# EAGLE board Thing_Plus_MGM240P-Panel (EAGLE 9.6.2), part 1 of 9
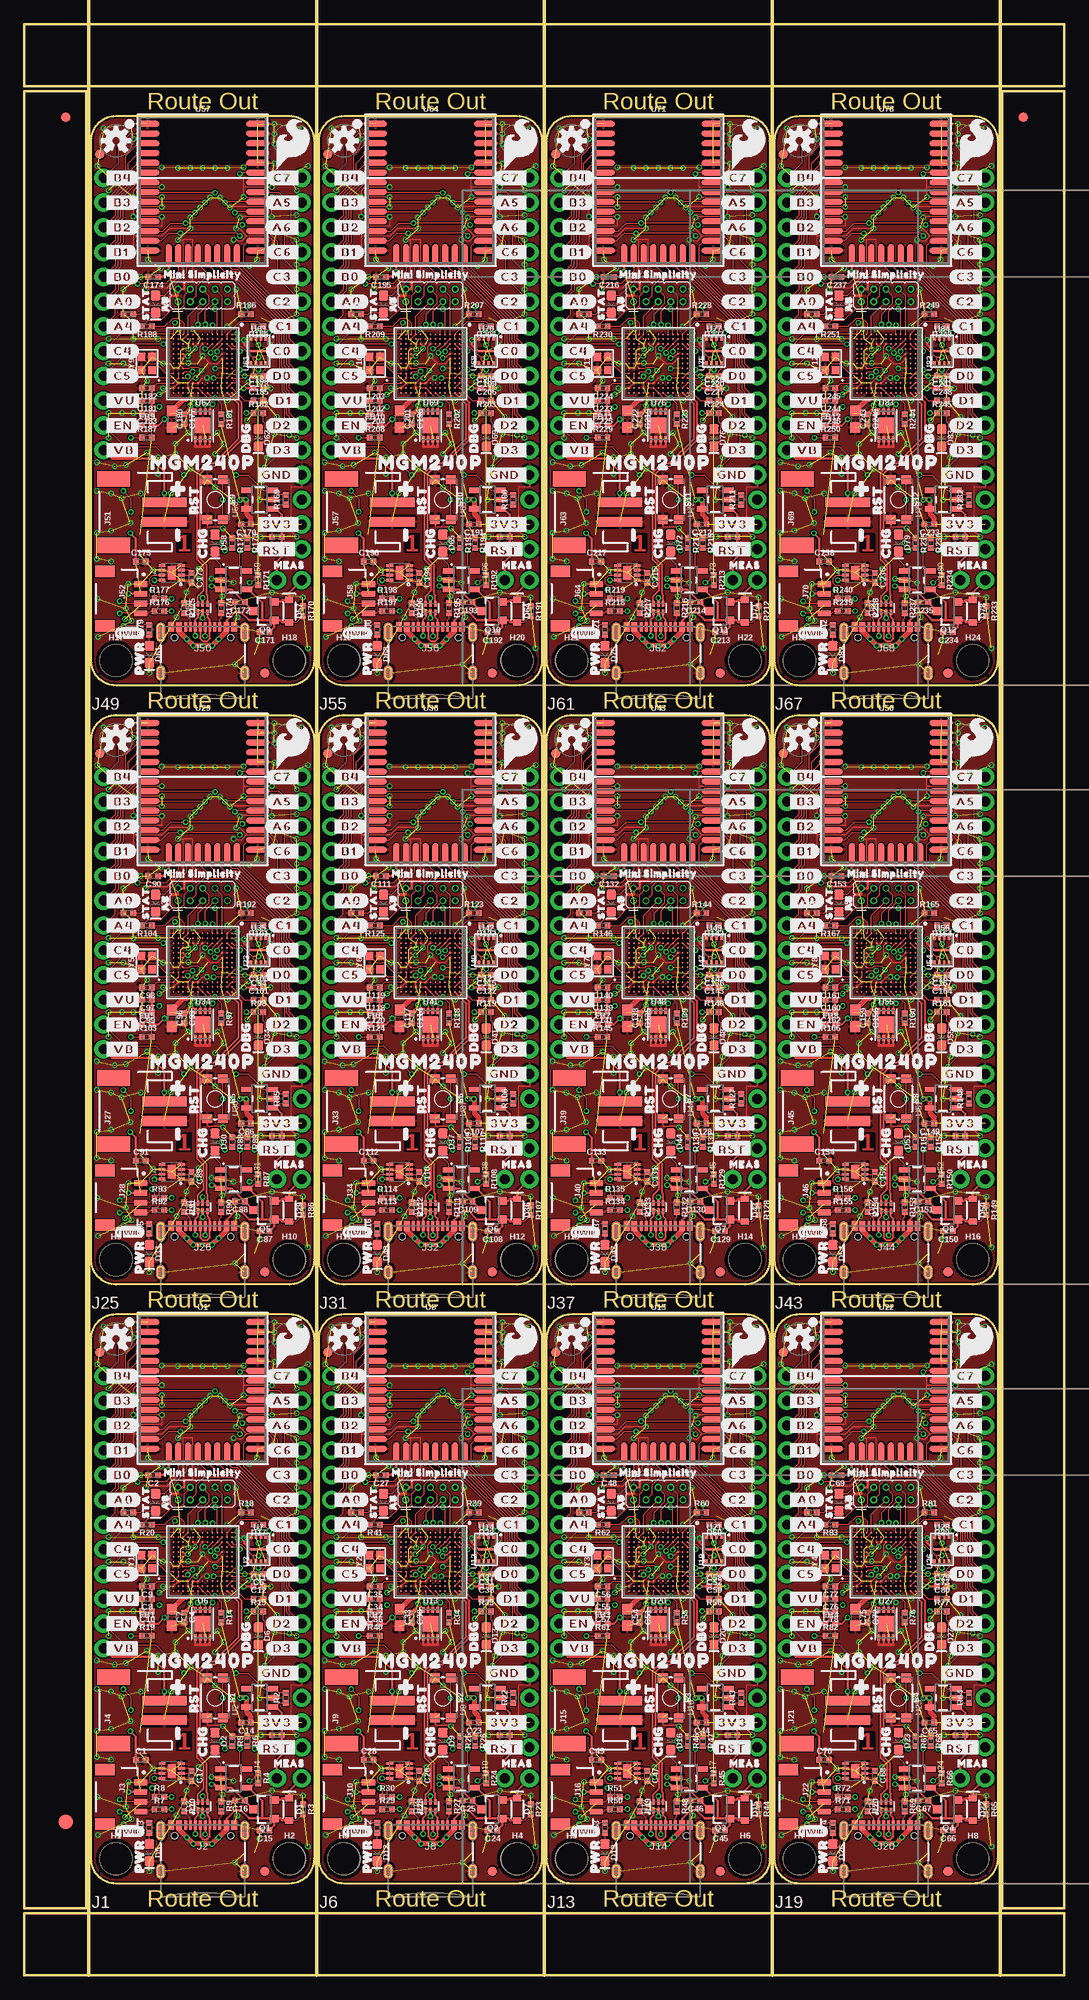
[diagram p0: board, top side]
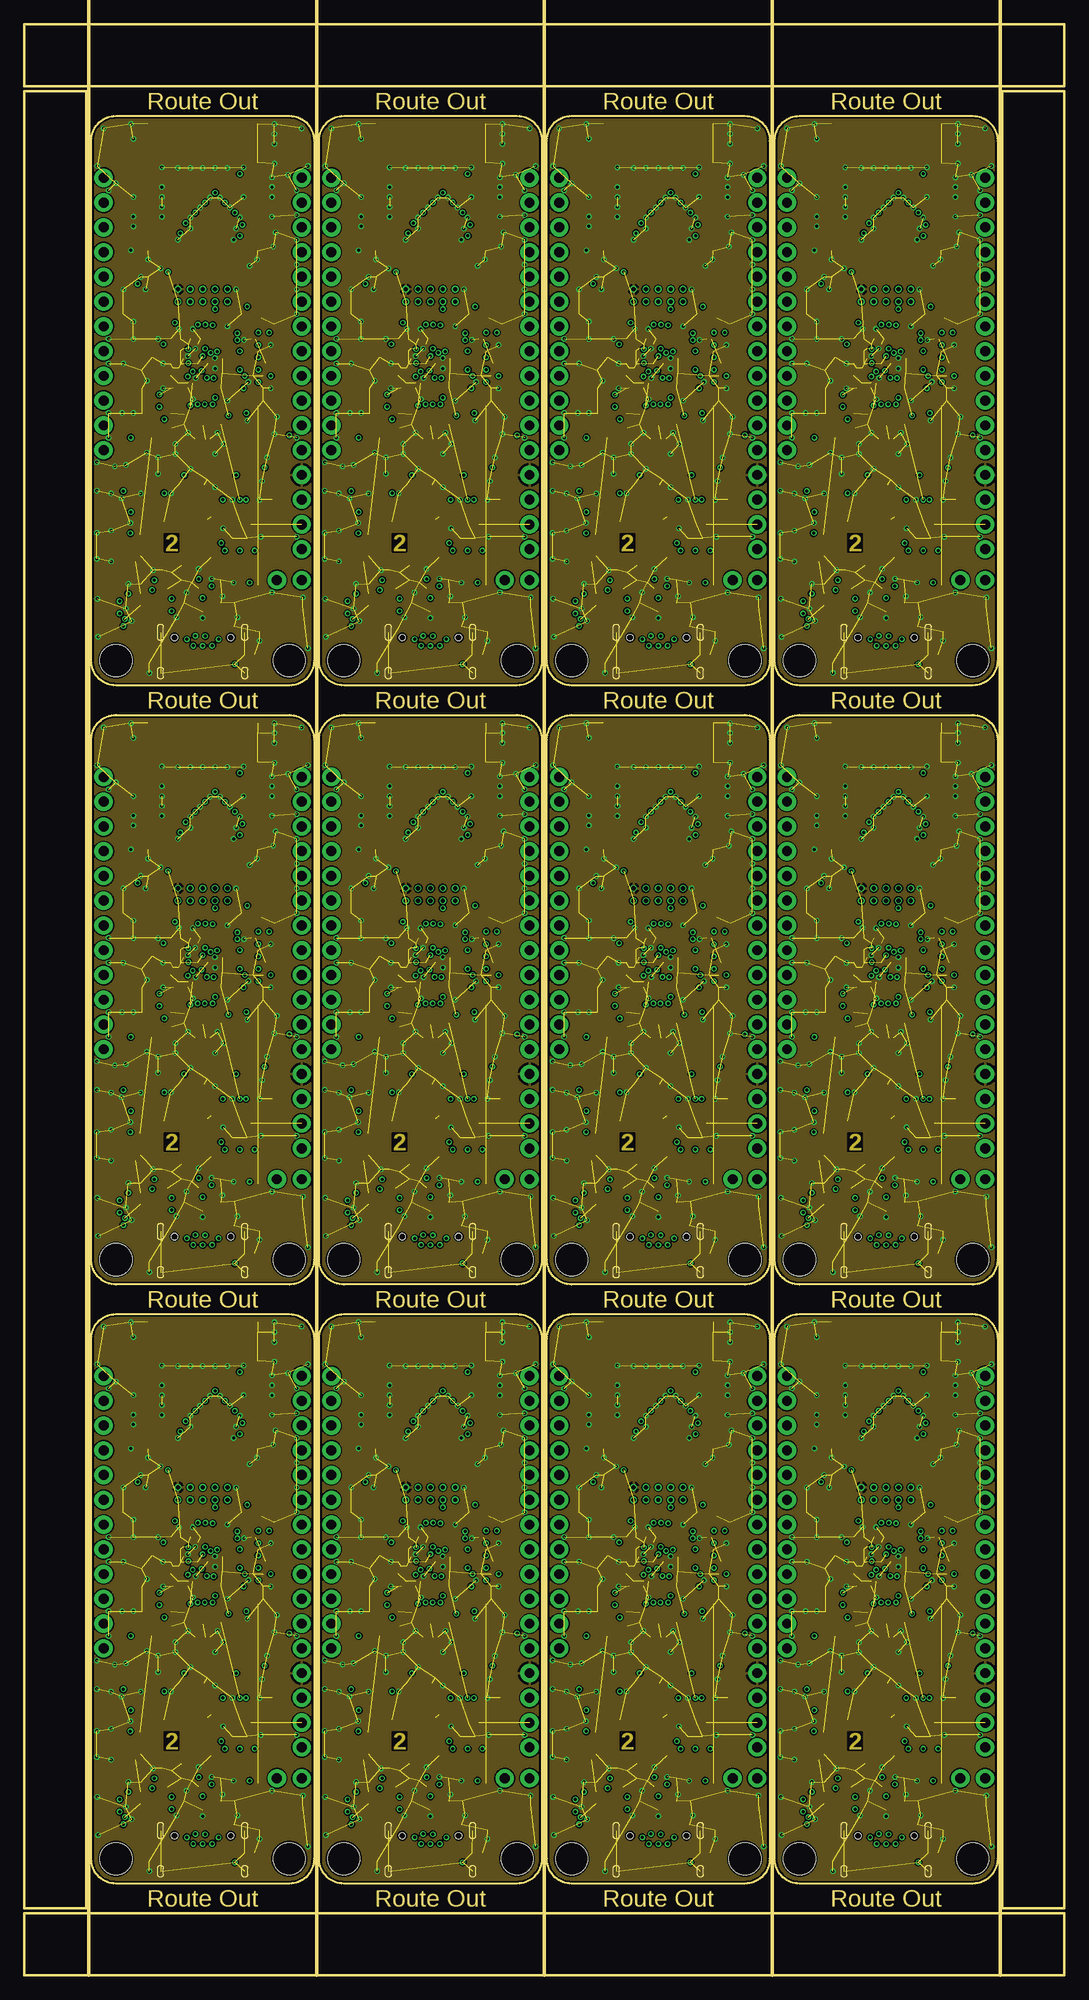
[diagram p1: board, inner layer Route2]
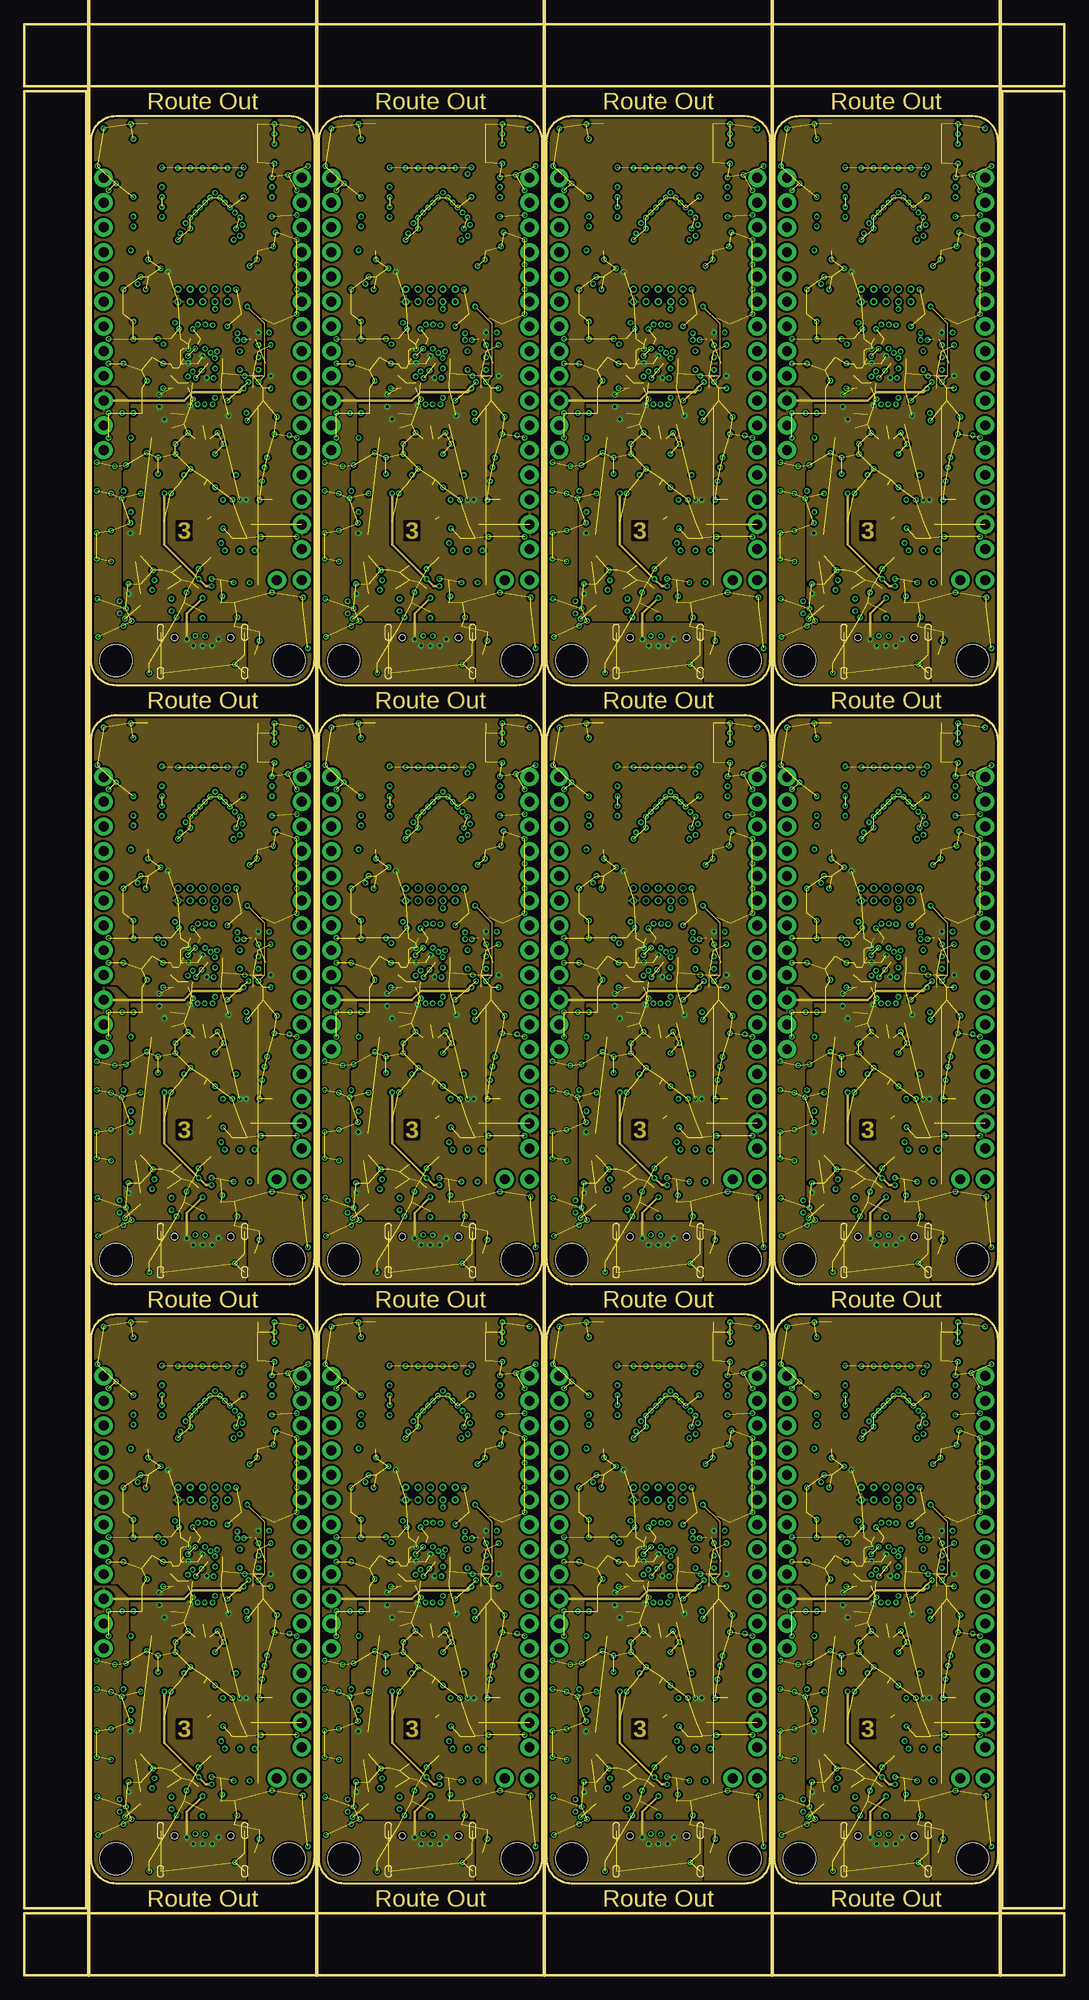
[diagram p2: board, inner layer Route15]
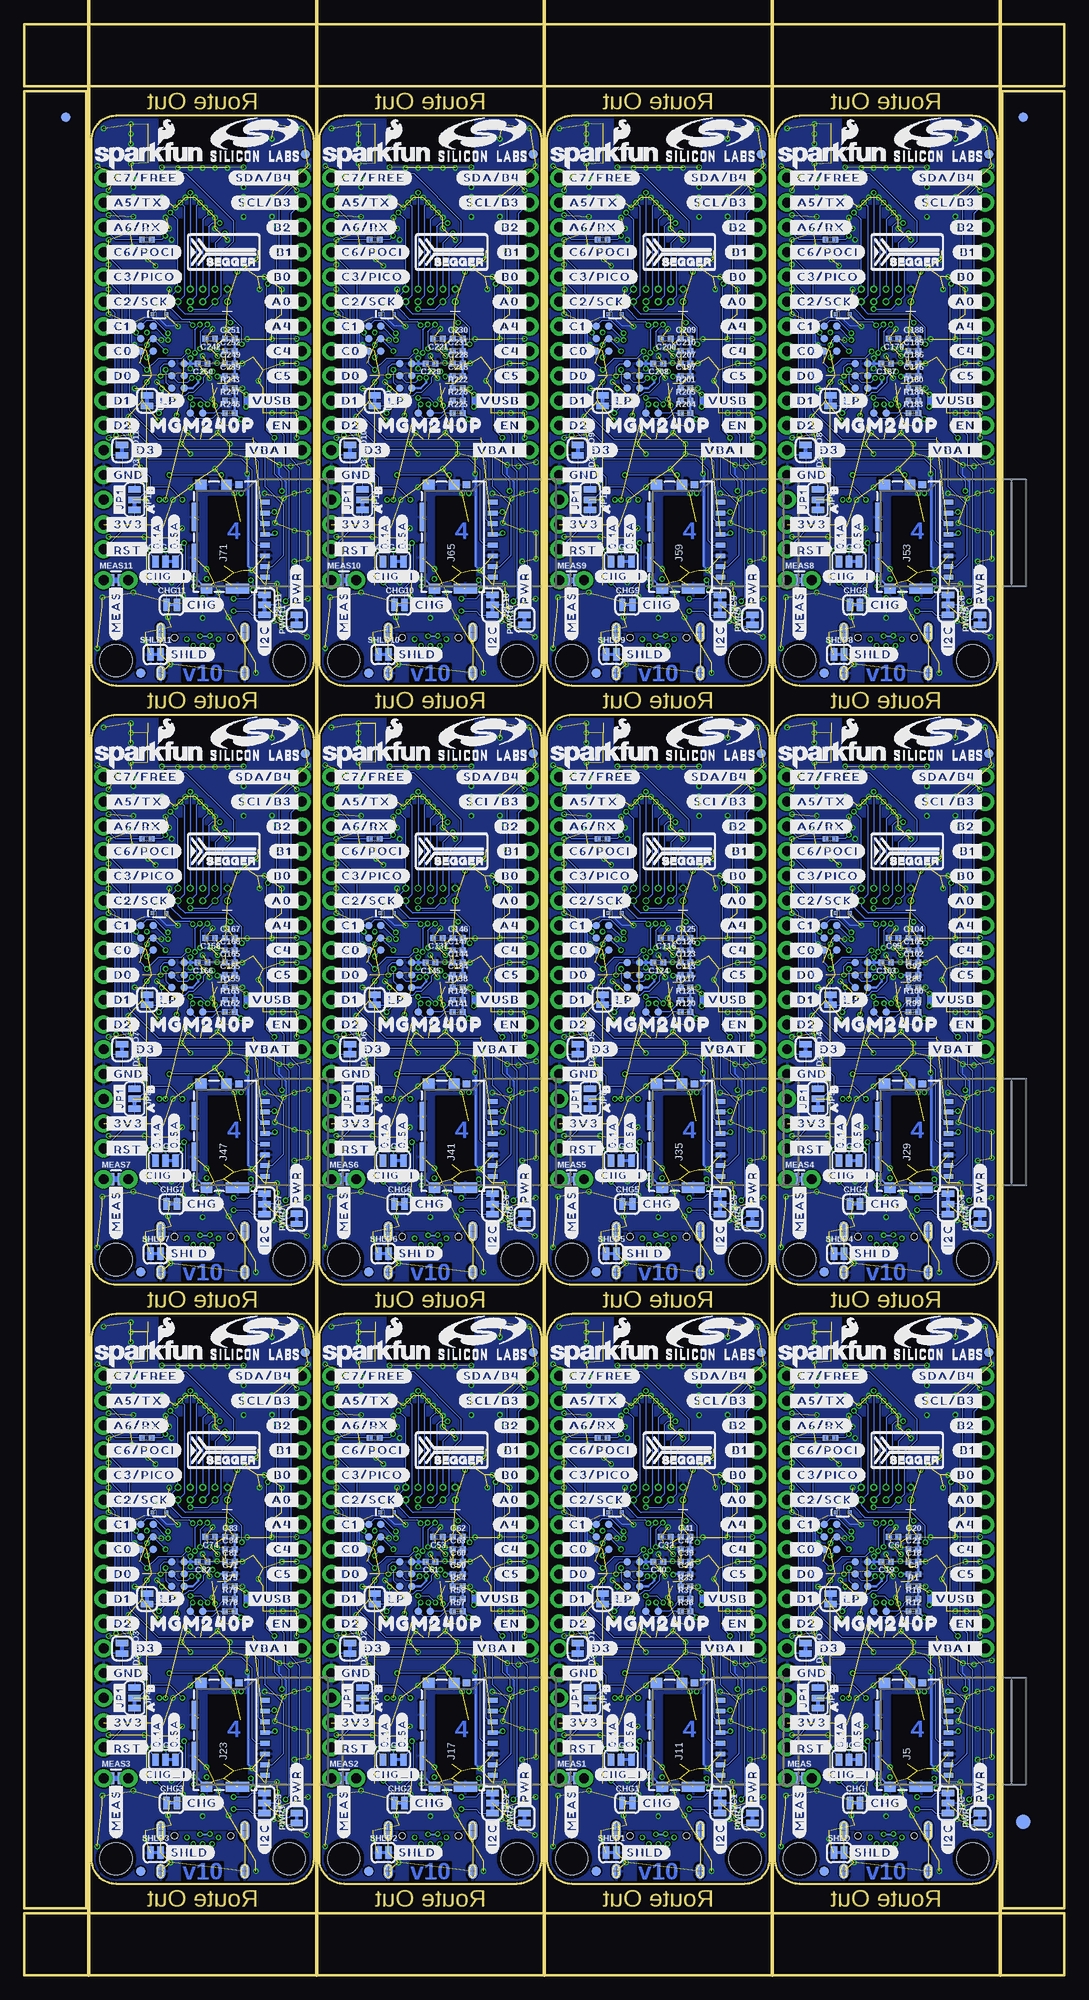
[diagram p3: board, bottom side, seen from below]

Size 106.68 x 200.15 mm. Coordinates in mm from the lower left corner, seen from the top.
Outline: 112 segments
Copper layers (1*2*15*16): Top 0.035559375mm / dielectric 0.47751875mm / Route2 0.035559375mm / dielectric 0.47751875mm / Route15 0.035559375mm / dielectric 0.47751875mm / Bottom 0.035559375mm
Design rules "Thing_Plus_MGM240P": minimum track width 5mil, minimum drill 0.2mm, track to track 5mil, track to pad 5mil, pad to pad 5mil, via to via 5mil, smd to smd 5mil, copper to edge 7mil, drill to drill 7mil, minimum pad ring 5mil, minimum via ring 5mil, stop-mask expansion 2.5mil, vias tented up to drill 25mil, thermal gap 10mil
Net classes: 1 USB: width 0.185 mm, clearance 0.127 mm
tRestrict: area 23.7,66.4 to 24.1,66.5; area 23.7,65.4 to 24.1,65.5; area 47.1,66.4 to 47.5,66.5; area 47.1,65.4 to 47.5,65.5; area 70.5,66.4 to 70.9,66.5; area 70.5,65.4 to 70.9,65.5; area 93.9,66.4 to 94.2,66.5; area 93.9,65.4 to 94.2,65.5; area 23.7,127.9 to 24.1,128; area 23.7,126.9 to 24.1,127; area 47.1,127.9 to 47.5,128; area 47.1,126.9 to 47.5,127; 12 more areas
bRestrict: area 16.6,53.6 to 16.8,53.7; area 17.3,54.6 to 17.4,54.7; area 17.9,56.3 to 18,56.4; area 18.5,57 to 18.7,57.2; area 19.2,58.4 to 19.3,58.5; area 19.8,58.4 to 19.9,58.5; area 20.4,57 to 20.6,57.2; area 40,53.6 to 40.1,53.7; area 40.6,54.6 to 40.8,54.7; area 41.3,56.3 to 41.4,56.4; area 41.9,57 to 42,57.2; area 42.5,58.4 to 42.7,58.5; 72 more areas
Milling: 5 lines

## Footprints (pad centres in the part's own frame; a part is rotated, then mirrored left to right if it is on the bottom)
0402-TIGHT = smd 0.6 x 0.6: 1 -0.5,0; 2 0.5,0
0603 = smd 1.1 x 1: 1 -0.85,0; 2 0.85,0
SMT-JUMPER_2_NC_TRACE_SILK = smd 0.66 x 1.27: 1 -0.521,0; 2 0.521,0
SMT-JUMPER_3_1-NC_TRACE_SILK = smd 0.66 x 1.27: 1 -1.041,0; 2 0,0; 3 1.041,0
SOD-323 = smd 0.63 x 0.83: A 1.15,0; C -1.15,0
LED-0603 = smd 1 x 1: A -0.877,0; C 0.877,0
SOT886 = smd 0.61 x 0.25: 1 -0.405,0.5 | smd 0.56 x 0.25: 2 -0.43,0; 3 -0.43,-0.5; 4 0.43,-0.5; 5 0.43,0; 6 0.43,0.5
SOD-523 = smd 0.4 x 0.4: A -0.7,0; C 0.7,0
FIDUCIAL-1X2 = smd 1 x 1: 1 0,0
FIDUCIAL-1.5X3 = smd 1.5 x 1.5: 1 0,0
STAND-OFF = hole 3.302: 0,0
SMT-JUMPER_3_2-NC_TRACE_SILK = smd 0.66 x 1.27: 1 -1.041,0; 2 0,0; 3 1.041,0
THING_PLUS = drill 1.016 pad 1.88: 1 1.27,52.07; 2 1.27,49.53; 3 1.27,46.99; 4 1.27,44.45; 5 1.27,41.91; 6 1.27,39.37; 7 1.27,36.83; 8 1.27,34.29; 9 1.27,31.75; 10 1.27,29.21; 11 1.27,26.67; 12 1.27,24.13; 13 21.59,52.07; 14 21.59,49.53; 15 21.59,46.99; 16 21.59,44.45; 17 21.59,41.91; 18 21.59,39.37; 19 21.59,36.83; 20 21.59,34.29; 21 21.59,31.75; 22 21.59,29.21; 23 21.59,26.67; 24 21.59,24.13; 25 21.59,21.59; 26 21.59,19.05; 27 21.59,16.51; 28 21.59,13.97
USB-C-16P-4LAYER-ISOLATED = smd 0.3 x 1: A5 -1.25,-0.34; A6 -0.25,-0.34; A7 0.25,-0.34; A8 1.25,-0.34; B5 1.75,-0.34; B6 0.75,-0.34; B7 -0.75,-0.34; B8 -1.75,-0.34 | smd 0.6 x 1: GND -3.225,-0.34; GND2 3.225,-0.34; VBUS1 -2.45,-0.34; VBUS2 2.45,-0.34 | smd 1 x 2.1: SHLD1 -4.32,-0.915; SHLD2 4.32,-0.915 | smd 1 x 2.1 bottom: SHLD3 -4.32,-0.915; SHLD4 4.32,-0.915 | smd 1 x 1.6: SHLD5 -4.32,-5.095; SHLD8 4.32,-5.095 | smd 1 x 1.6 bottom: SHLD6 -4.32,-5.095; SHLD7 4.32,-5.095 | hole 0.65: -2.89,-1.445; 2.89,-1.445
JST04_1MM_RA = smd 0.6 x 1.35: 1 -1.5,0; 2 -0.5,0; 3 0.5,0; 4 1.5,0 | smd 1.2 x 2: NC1 2.8,-3.675; NC2 -2.8,-3.675
JST-2-SMD = smd 1 x 4.6: 1 -1,-3.7; 2 1,-3.7 | smd 1.6 x 3.4: NC1 -3.4,1.5; NC2 3.4,1.5
MICROSD_TINY = smd 0.5 x 1: 1 3.55,-3.85; 2 2.45,-3.85; 3 1.35,-3.85; 4 0.25,-3.85; 5 -0.85,-3.85; 6 -1.95,-3.85; 7 -3.05,-3.85; 8 -4.15,-3.85 | smd 0.72 x 0.78: 9 5.35,-1.17 | smd 1.05 x 1.08: GND1 5.35,0.1 | smd 1.05 x 1.2: GND2 5.35,2.71; GND3 -5.325,2.14 | smd 1.05 x 2.39: GND4 -5.325,-1.045 | smd 2.91 x 0.55: GND5 -2.145,3.385; GND6 2.045,3.385
2X5_PTH_SILK_.05 = drill 0.432: 1 0,0; 2 0,1.27; 3 1.27,0; 4 1.27,1.27; 5 2.54,0; 6 2.54,1.27; 7 3.81,0; 8 3.81,1.27; 9 5.08,0; 10 5.08,1.27
COMBO-JUMPER_2_NC_TRACE = smd 0.635 x 1.27: 1 -0.508,0; 2 0.508,0 | drill 1.016 pad 1.88: 3 -1.27,0; 4 1.27,0
SOT23-3 = smd 0.8 x 0.9: 1 -0.95,-1; 2 0.95,-1; 3 0,1.1
TACTILE_SWITCH_SMD_4.6X2.8MM = smd 0.9 x 1: 1 -2.05,-0.8; 2 2.05,-0.8; 3 2.05,0.8; 4 -2.05,0.8
PAD.03X.03 = smd 0.762 x 0.762: 1 0,0
MGM240P = smd 2.4 x 0.6: 1 -5.65,6.8; 2 -5.65,5.8; 3 -5.65,4.8; 4 -5.65,3.8; 5 -5.65,2.8; 6 -5.65,1.8; 7 -5.65,0.8; 8 -5.65,-0.2; 9 -5.65,-1.2; 10 -5.65,-2.2; 11 -5.65,-3.2; 12 -5.65,-4.2; 13 -5.65,-5.2; 14 -5.65,-6.2; 23 5.65,-6.2; 24 5.65,-5.2; 25 5.65,-4.2; 26 5.65,-3.2; 27 5.65,-2.2; 28 5.65,-1.2; 29 5.65,-0.2; 30 5.65,0.8; 31 5.65,1.8; 32 5.65,2.8; 33 5.65,3.8; 34 5.65,4.8; 35 5.65,5.8; 36 5.65,6.8 | smd 0.6 x 2.4: 15 -3.5,-6.7; 16 -2.5,-6.7; 17 -1.5,-6.7; 18 -0.5,-6.7; 19 0.5,-6.7; 20 1.5,-6.7; 21 2.5,-6.7; 22 3.5,-6.7
SOT23-5 = smd 0.55 x 1.2: 1 -0.95,-1.3; 2 0,-1.3; 3 0.95,-1.3; 4 0.95,1.3; 5 -0.95,1.3
EFM32GG12B410F1024GL120 = smd 0.2 x 0.2: A1 -3,3; A2 -2.5,3; A3 -2,3; A4 -1.5,3; A5 -1,3; A6 -0.5,3; A7 0,3; A8 0.5,3; A9 1,3; A10 1.5,3; A11 2,3; A12 2.5,3; A13 3,3; B1 -3,2.5; B2 -2.5,2.5; B3 -2,2.5; B4 -1.5,2.5; B5 -1,2.5; B6 -0.5,2.5; B7 0,2.5; B8 0.5,2.5; B9 1,2.5; B10 1.5,2.5; B11 2,2.5; B12 2.5,2.5; B13 3,2.5; C1 -3,2; C2 -2.5,2; C3 -2,2; C4 -1.5,2; C5 -1,2; C6 -0.5,2; C7 0,2; C8 0.5,2; C9 1,2; C10 1.5,2; C11 2,2; C12 2.5,2; C13 3,2; D1 -3,1.5; D2 -2.5,1.5; D3 -2,1.5; D11 2,1.5; D12 2.5,1.5; D13 3,1.5; E1 -3,1; E2 -2.5,1; E3 -2,1; E11 2,1; E12 2.5,1; E13 3,1; F1 -3,0.5; F2 -2.5,0.5; F3 -2,0.5; F11 2,0.5; F12 2.5,0.5; F13 3,0.5; G1 -3,0; G2 -2.5,0; G3 -2,0; G11 2,0; G12 2.5,0; G13 3,0; H1 -3,-0.5; H2 -2.5,-0.5; H3 -2,-0.5; H11 2,-0.5; H12 2.5,-0.5; H13 3,-0.5; J1 -3,-1; J2 -2.5,-1; J3 -2,-1; J11 2,-1; J12 2.5,-1; J13 3,-1; K1 -3,-1.5; K2 -2.5,-1.5; K3 -2,-1.5; K11 2,-1.5; K12 2.5,-1.5; K13 3,-1.5; L1 -3,-2; L2 -2.5,-2; L3 -2,-2; L4 -1.5,-2; L5 -1,-2; L6 -0.5,-2; L7 0,-2; L8 0.5,-2; L9 1,-2; L10 1.5,-2; L11 2,-2; L12 2.5,-2; L13 3,-2; M1 -3,-2.5; M2 -2.5,-2.5; M3 -2,-2.5; M4 -1.5,-2.5; M5 -1,-2.5; M6 -0.5,-2.5; M7 0,-2.5; M8 0.5,-2.5; M9 1,-2.5; M10 1.5,-2.5; M11 2,-2.5; M12 2.5,-2.5; M13 3,-2.5; N1 -3,-3; N2 -2.5,-3; N3 -2,-3; N4 -1.5,-3; N5 -1,-3; N6 -0.5,-3; N7 0,-3; N8 0.5,-3; N9 1,-3; N10 1.5,-3; N11 2,-3; N12 2.5,-3; N13 3,-3
DFN-8 = smd 0.3 x 0.7: 1 -0.75,-0.99; 2 -0.25,-0.99; 3 0.25,-0.99; 4 0.75,-0.99; 5 0.75,0.99; 6 0.25,0.99; 7 -0.25,0.99; 8 -0.75,0.99 | smd 1.38 x 0.8: 9 0,0
M24C02-FMC6TG = smd 0.3 x 0.6: 1 -0.75,-1.4; 2 -0.25,-1.4; 3 0.25,-1.4; 4 0.75,-1.4; 5 0.75,1.4; 6 0.25,1.4; 7 -0.25,1.4; 8 -0.75,1.4 | smd 1.6 x 1.6: EPAD 0,0
MX25R8035FZUIL0 = smd 0.25 x 0.4: 1 0.75,1.25; 2 0.25,1.25; 3 -0.25,1.25; 4 -0.75,1.25; 5 -0.75,-1.25; 6 -0.25,-1.25; 7 0.25,-1.25; 8 0.75,-1.25 | smd 1.6 x 0.2: EPAD 0,0
CRYSTAL-SMD-2.0X1.6MM-ECS = smd 0.85 x 0.75: 1 -0.675,-0.525; 2 0.675,-0.525; 3 0.675,0.525; 4 -0.675,0.525

## Placement (x,y rotation side)
C1  10uF  [0402-TIGHT]  11.94,22.1 0 top
C2  0.1uF  [0402-TIGHT]  13.21,51.31 180 top
C3  0.1uF  [0402-TIGHT]  15.49,41.15 0 bottom
C4  0.1uF  [0402-TIGHT]  16.38,36.7 270 top
C5  0.1uF  [0402-TIGHT]  24,41.15 180 top
C6  10uF  [0402-TIGHT]  17.53,44.96 180 bottom
C7  1.0uF  [0603]  15.11,36.7 270 top
C8  10nF  [0402-TIGHT]  12.57,38.61 180 top
C9  10nF  [0402-TIGHT]  12.57,39.88 180 top
C10  1.0uF  [0402-TIGHT]  12.57,37.34 180 top
C11  1.0uF  [0402-TIGHT]  24,39.88 0 top
C12  4.7uF  [0402-TIGHT]  24,38.61 0 top
C13  1.0uF  [0402-TIGHT]  25.91,24.64 180 top
C14  2.2uF  [0402-TIGHT]  22.73,25.91 180 top
C15  4.7uF  [0402-TIGHT]  24.64,14.86 180 top
C16  4.7uF  [0402-TIGHT]  22.1,17.91 180 top
C17  0.1uF  [0402-TIGHT]  17.14,20.45 270 top
C18  0.1uF  [0402-TIGHT]  15.49,42.42 0 bottom
C19  0.1uF  [0402-TIGHT]  18.29,42.42 180 bottom
C20  0.1uF  [0402-TIGHT]  15.49,44.96 0 bottom
C21  0.1uF  [0402-TIGHT]  15.49,43.69 0 bottom
C22  1.0uF  [0402-TIGHT]  49.28,24.64 180 top
C23  2.2uF  [0402-TIGHT]  46.1,25.91 180 top
C24  4.7uF  [0402-TIGHT]  48.01,14.86 180 top
C25  4.7uF  [0402-TIGHT]  45.47,17.91 180 top
C26  0.1uF  [0402-TIGHT]  40.51,20.45 270 top
C27  0.1uF  [0402-TIGHT]  36.58,51.31 180 top
C28  10uF  [0402-TIGHT]  35.31,22.1 0 top
C29  0.1uF  [0402-TIGHT]  38.86,41.15 0 bottom
C30  0.1uF  [0402-TIGHT]  39.75,36.7 270 top
C31  0.1uF  [0402-TIGHT]  47.37,41.15 180 top
C32  10uF  [0402-TIGHT]  40.89,44.96 180 bottom
C33  1.0uF  [0603]  38.48,36.7 270 top
C34  10nF  [0402-TIGHT]  35.94,38.61 180 top
C35  10nF  [0402-TIGHT]  35.94,39.88 180 top
C36  1.0uF  [0402-TIGHT]  35.94,37.34 180 top
C37  1.0uF  [0402-TIGHT]  47.37,39.88 0 top
C38  4.7uF  [0402-TIGHT]  47.37,38.61 0 top
C39  0.1uF  [0402-TIGHT]  38.86,42.42 0 bottom
C40  0.1uF  [0402-TIGHT]  41.66,42.42 180 bottom
C41  0.1uF  [0402-TIGHT]  38.86,44.96 0 bottom
C42  0.1uF  [0402-TIGHT]  38.86,43.69 0 bottom
C43  1.0uF  [0402-TIGHT]  72.64,24.64 180 top
C44  2.2uF  [0402-TIGHT]  69.47,25.91 180 top
C45  4.7uF  [0402-TIGHT]  71.37,14.86 180 top
C46  4.7uF  [0402-TIGHT]  68.83,17.91 180 top
C47  0.1uF  [0402-TIGHT]  63.88,20.45 270 top
C48  0.1uF  [0402-TIGHT]  59.94,51.31 180 top
C49  10uF  [0402-TIGHT]  58.67,22.1 0 top
C50  0.1uF  [0402-TIGHT]  62.23,41.15 0 bottom
C51  0.1uF  [0402-TIGHT]  63.12,36.7 270 top
C52  0.1uF  [0402-TIGHT]  70.74,41.15 180 top
C53  10uF  [0402-TIGHT]  64.26,44.96 180 bottom
C54  1.0uF  [0603]  61.85,36.7 270 top
C55  10nF  [0402-TIGHT]  59.31,38.61 180 top
C56  10nF  [0402-TIGHT]  59.31,39.88 180 top
C57  1.0uF  [0402-TIGHT]  59.31,37.34 180 top
C58  1.0uF  [0402-TIGHT]  70.74,39.88 0 top
C59  4.7uF  [0402-TIGHT]  70.74,38.61 0 top
C60  0.1uF  [0402-TIGHT]  62.23,42.42 0 bottom
C61  0.1uF  [0402-TIGHT]  65.02,42.42 180 bottom
C62  0.1uF  [0402-TIGHT]  62.23,44.96 0 bottom
C63  0.1uF  [0402-TIGHT]  62.23,43.69 0 bottom
C64  1.0uF  [0402-TIGHT]  96.01,24.64 180 top
C65  2.2uF  [0402-TIGHT]  92.84,25.91 180 top
C66  4.7uF  [0402-TIGHT]  94.74,14.86 180 top
C67  4.7uF  [0402-TIGHT]  92.2,17.91 180 top
C68  0.1uF  [0402-TIGHT]  87.25,20.45 270 top
C69  0.1uF  [0402-TIGHT]  83.31,51.31 180 top
C70  10uF  [0402-TIGHT]  82.04,22.1 0 top
C71  0.1uF  [0402-TIGHT]  85.6,41.15 0 bottom
C72  0.1uF  [0402-TIGHT]  86.49,36.7 270 top
C73  0.1uF  [0402-TIGHT]  94.11,41.15 180 top
C74  10uF  [0402-TIGHT]  87.63,44.96 180 bottom
C75  1.0uF  [0603]  85.22,36.7 270 top
C76  10nF  [0402-TIGHT]  82.68,38.61 180 top
C77  10nF  [0402-TIGHT]  82.68,39.88 180 top
C78  1.0uF  [0402-TIGHT]  82.68,37.34 180 top
C79  1.0uF  [0402-TIGHT]  94.11,39.88 0 top
C80  4.7uF  [0402-TIGHT]  94.11,38.61 0 top
C81  0.1uF  [0402-TIGHT]  85.6,42.42 0 bottom
C82  0.1uF  [0402-TIGHT]  88.39,42.42 180 bottom
C83  0.1uF  [0402-TIGHT]  85.6,44.96 0 bottom
C84  0.1uF  [0402-TIGHT]  85.6,43.69 0 bottom
C85  1.0uF  [0402-TIGHT]  25.91,86.11 180 top
C86  2.2uF  [0402-TIGHT]  22.73,87.38 180 top
C87  4.7uF  [0402-TIGHT]  24.64,76.33 180 top
C88  4.7uF  [0402-TIGHT]  22.1,79.38 180 top
C89  0.1uF  [0402-TIGHT]  17.14,81.91 270 top
C90  0.1uF  [0402-TIGHT]  13.21,112.78 180 top
C91  10uF  [0402-TIGHT]  11.94,83.57 0 top
C92  0.1uF  [0402-TIGHT]  15.49,102.62 0 bottom
C93  0.1uF  [0402-TIGHT]  16.38,98.17 270 top
C94  0.1uF  [0402-TIGHT]  24,102.62 180 top
C95  10uF  [0402-TIGHT]  17.53,106.43 180 bottom
C96  1.0uF  [0603]  15.11,98.17 270 top
C97  10nF  [0402-TIGHT]  12.57,100.08 180 top
C98  10nF  [0402-TIGHT]  12.57,101.35 180 top
C99  1.0uF  [0402-TIGHT]  12.57,98.81 180 top
C100  1.0uF  [0402-TIGHT]  24,101.35 0 top
C101  4.7uF  [0402-TIGHT]  24,100.08 0 top
C102  0.1uF  [0402-TIGHT]  15.49,103.89 0 bottom
C103  0.1uF  [0402-TIGHT]  18.29,103.89 180 bottom
C104  0.1uF  [0402-TIGHT]  15.49,106.43 0 bottom
C105  0.1uF  [0402-TIGHT]  15.49,105.16 0 bottom
C106  1.0uF  [0402-TIGHT]  49.28,86.11 180 top
C107  2.2uF  [0402-TIGHT]  46.1,87.38 180 top
C108  4.7uF  [0402-TIGHT]  48.01,76.33 180 top
C109  4.7uF  [0402-TIGHT]  45.47,79.38 180 top
C110  0.1uF  [0402-TIGHT]  40.51,81.91 270 top
C111  0.1uF  [0402-TIGHT]  36.58,112.78 180 top
C112  10uF  [0402-TIGHT]  35.31,83.57 0 top
C113  0.1uF  [0402-TIGHT]  38.86,102.62 0 bottom
C114  0.1uF  [0402-TIGHT]  39.75,98.17 270 top
C115  0.1uF  [0402-TIGHT]  47.37,102.62 180 top
C116  10uF  [0402-TIGHT]  40.89,106.43 180 bottom
C117  1.0uF  [0603]  38.48,98.17 270 top
C118  10nF  [0402-TIGHT]  35.94,100.08 180 top
C119  10nF  [0402-TIGHT]  35.94,101.35 180 top
C120  1.0uF  [0402-TIGHT]  35.94,98.81 180 top
C121  1.0uF  [0402-TIGHT]  47.37,101.35 0 top
C122  4.7uF  [0402-TIGHT]  47.37,100.08 0 top
C123  0.1uF  [0402-TIGHT]  38.86,103.89 0 bottom
C124  0.1uF  [0402-TIGHT]  41.66,103.89 180 bottom
C125  0.1uF  [0402-TIGHT]  38.86,106.43 0 bottom
C126  0.1uF  [0402-TIGHT]  38.86,105.16 0 bottom
C127  1.0uF  [0402-TIGHT]  72.64,86.11 180 top
C128  2.2uF  [0402-TIGHT]  69.47,87.38 180 top
C129  4.7uF  [0402-TIGHT]  71.37,76.33 180 top
C130  4.7uF  [0402-TIGHT]  68.83,79.38 180 top
C131  0.1uF  [0402-TIGHT]  63.88,81.91 270 top
C132  0.1uF  [0402-TIGHT]  59.94,112.78 180 top
C133  10uF  [0402-TIGHT]  58.67,83.57 0 top
C134  0.1uF  [0402-TIGHT]  62.23,102.62 0 bottom
C135  0.1uF  [0402-TIGHT]  63.12,98.17 270 top
C136  0.1uF  [0402-TIGHT]  70.74,102.62 180 top
C137  10uF  [0402-TIGHT]  64.26,106.43 180 bottom
C138  1.0uF  [0603]  61.85,98.17 270 top
C139  10nF  [0402-TIGHT]  59.31,100.08 180 top
C140  10nF  [0402-TIGHT]  59.31,101.35 180 top
C141  1.0uF  [0402-TIGHT]  59.31,98.81 180 top
C142  1.0uF  [0402-TIGHT]  70.74,101.35 0 top
C143  4.7uF  [0402-TIGHT]  70.74,100.08 0 top
C144  0.1uF  [0402-TIGHT]  62.23,103.89 0 bottom
C145  0.1uF  [0402-TIGHT]  65.02,103.89 180 bottom
C146  0.1uF  [0402-TIGHT]  62.23,106.43 0 bottom
C147  0.1uF  [0402-TIGHT]  62.23,105.16 0 bottom
C148  1.0uF  [0402-TIGHT]  96.01,86.11 180 top
C149  2.2uF  [0402-TIGHT]  92.84,87.38 180 top
C150  4.7uF  [0402-TIGHT]  94.74,76.33 180 top
C151  4.7uF  [0402-TIGHT]  92.2,79.38 180 top
C152  0.1uF  [0402-TIGHT]  87.25,81.91 270 top
C153  0.1uF  [0402-TIGHT]  83.31,112.78 180 top
C154  10uF  [0402-TIGHT]  82.04,83.57 0 top
C155  0.1uF  [0402-TIGHT]  85.6,102.62 0 bottom
C156  0.1uF  [0402-TIGHT]  86.49,98.17 270 top
C157  0.1uF  [0402-TIGHT]  94.11,102.62 180 top
C158  10uF  [0402-TIGHT]  87.63,106.43 180 bottom
C159  1.0uF  [0603]  85.22,98.17 270 top
C160  10nF  [0402-TIGHT]  82.68,100.08 180 top
C161  10nF  [0402-TIGHT]  82.68,101.35 180 top
C162  1.0uF  [0402-TIGHT]  82.68,98.81 180 top
C163  1.0uF  [0402-TIGHT]  94.11,101.35 0 top
C164  4.7uF  [0402-TIGHT]  94.11,100.08 0 top
C165  0.1uF  [0402-TIGHT]  85.6,103.89 0 bottom
C166  0.1uF  [0402-TIGHT]  88.39,103.89 180 bottom
C167  0.1uF  [0402-TIGHT]  85.6,106.43 0 bottom
C168  0.1uF  [0402-TIGHT]  85.6,105.16 0 bottom
C169  1.0uF  [0402-TIGHT]  25.91,147.57 180 top
C170  2.2uF  [0402-TIGHT]  22.73,148.84 180 top
C171  4.7uF  [0402-TIGHT]  24.64,137.79 180 top
C172  4.7uF  [0402-TIGHT]  22.1,140.84 180 top
C173  0.1uF  [0402-TIGHT]  17.14,143.38 270 top
C174  0.1uF  [0402-TIGHT]  13.21,174.24 180 top
C175  10uF  [0402-TIGHT]  11.94,145.03 0 top
C176  0.1uF  [0402-TIGHT]  15.49,164.08 0 bottom
C177  0.1uF  [0402-TIGHT]  16.38,159.64 270 top
C178  0.1uF  [0402-TIGHT]  24,164.08 180 top
C179  10uF  [0402-TIGHT]  17.53,167.89 180 bottom
C180  1.0uF  [0603]  15.11,159.64 270 top
C181  10nF  [0402-TIGHT]  12.57,161.54 180 top
C182  10nF  [0402-TIGHT]  12.57,162.81 180 top
C183  1.0uF  [0402-TIGHT]  12.57,160.27 180 top
C184  1.0uF  [0402-TIGHT]  24,162.81 0 top
C185  4.7uF  [0402-TIGHT]  24,161.54 0 top
C186  0.1uF  [0402-TIGHT]  15.49,165.35 0 bottom
C187  0.1uF  [0402-TIGHT]  18.29,165.35 180 bottom
C188  0.1uF  [0402-TIGHT]  15.49,167.89 0 bottom
C189  0.1uF  [0402-TIGHT]  15.49,166.62 0 bottom
C190  1.0uF  [0402-TIGHT]  49.28,147.57 180 top
C191  2.2uF  [0402-TIGHT]  46.1,148.84 180 top
C192  4.7uF  [0402-TIGHT]  48.01,137.79 180 top
C193  4.7uF  [0402-TIGHT]  45.47,140.84 180 top
C194  0.1uF  [0402-TIGHT]  40.51,143.38 270 top
C195  0.1uF  [0402-TIGHT]  36.58,174.24 180 top
C196  10uF  [0402-TIGHT]  35.31,145.03 0 top
C197  0.1uF  [0402-TIGHT]  38.86,164.08 0 bottom
C198  0.1uF  [0402-TIGHT]  39.75,159.64 270 top
C199  0.1uF  [0402-TIGHT]  47.37,164.08 180 top
C200  10uF  [0402-TIGHT]  40.89,167.89 180 bottom
C201  1.0uF  [0603]  38.48,159.64 270 top
C202  10nF  [0402-TIGHT]  35.94,161.54 180 top
C203  10nF  [0402-TIGHT]  35.94,162.81 180 top
C204  1.0uF  [0402-TIGHT]  35.94,160.27 180 top
C205  1.0uF  [0402-TIGHT]  47.37,162.81 0 top
C206  4.7uF  [0402-TIGHT]  47.37,161.54 0 top
C207  0.1uF  [0402-TIGHT]  38.86,165.35 0 bottom
C208  0.1uF  [0402-TIGHT]  41.66,165.35 180 bottom
C209  0.1uF  [0402-TIGHT]  38.86,167.89 0 bottom
C210  0.1uF  [0402-TIGHT]  38.86,166.62 0 bottom
C211  1.0uF  [0402-TIGHT]  72.64,147.57 180 top
C212  2.2uF  [0402-TIGHT]  69.47,148.84 180 top
C213  4.7uF  [0402-TIGHT]  71.37,137.79 180 top
C214  4.7uF  [0402-TIGHT]  68.83,140.84 180 top
C215  0.1uF  [0402-TIGHT]  63.88,143.38 270 top
C216  0.1uF  [0402-TIGHT]  59.94,174.24 180 top
C217  10uF  [0402-TIGHT]  58.67,145.03 0 top
C218  0.1uF  [0402-TIGHT]  62.23,164.08 0 bottom
C219  0.1uF  [0402-TIGHT]  63.12,159.64 270 top
C220  0.1uF  [0402-TIGHT]  70.74,164.08 180 top
C221  10uF  [0402-TIGHT]  64.26,167.89 180 bottom
C222  1.0uF  [0603]  61.85,159.64 270 top
C223  10nF  [0402-TIGHT]  59.31,161.54 180 top
C224  10nF  [0402-TIGHT]  59.31,162.81 180 top
C225  1.0uF  [0402-TIGHT]  59.31,160.27 180 top
C226  1.0uF  [0402-TIGHT]  70.74,162.81 0 top
C227  4.7uF  [0402-TIGHT]  70.74,161.54 0 top
C228  0.1uF  [0402-TIGHT]  62.23,165.35 0 bottom
C229  0.1uF  [0402-TIGHT]  65.02,165.35 180 bottom
C230  0.1uF  [0402-TIGHT]  62.23,167.89 0 bottom
C231  0.1uF  [0402-TIGHT]  62.23,166.62 0 bottom
C232  1.0uF  [0402-TIGHT]  96.01,147.57 180 top
C233  2.2uF  [0402-TIGHT]  92.84,148.84 180 top
C234  4.7uF  [0402-TIGHT]  94.74,137.79 180 top
C235  4.7uF  [0402-TIGHT]  92.2,140.84 180 top
C236  0.1uF  [0402-TIGHT]  87.25,143.38 270 top
C237  0.1uF  [0402-TIGHT]  83.31,174.24 180 top
C238  10uF  [0402-TIGHT]  82.04,145.03 0 top
C239  0.1uF  [0402-TIGHT]  85.6,164.08 0 bottom
C240  0.1uF  [0402-TIGHT]  86.49,159.64 270 top
C241  0.1uF  [0402-TIGHT]  94.11,164.08 180 top
C242  10uF  [0402-TIGHT]  87.63,167.89 180 bottom
C243  1.0uF  [0603]  85.22,159.64 270 top
C244  10nF  [0402-TIGHT]  82.68,161.54 180 top
C245  10nF  [0402-TIGHT]  82.68,162.81 180 top
C246  1.0uF  [0402-TIGHT]  82.68,160.27 180 top
C247  1.0uF  [0402-TIGHT]  94.11,162.81 0 top
C248  4.7uF  [0402-TIGHT]  94.11,161.54 0 top
C249  0.1uF  [0402-TIGHT]  85.6,165.35 0 bottom
C250  0.1uF  [0402-TIGHT]  88.39,165.35 180 bottom
C251  0.1uF  [0402-TIGHT]  85.6,167.89 0 bottom
C252  0.1uF  [0402-TIGHT]  85.6,166.62 0 bottom
CHG  JUMPER-SMT_2_NC_TRACE_SILK  [SMT-JUMPER_2_NC_TRACE_SILK]  21.46,17.65 0 bottom
CHG1  JUMPER-SMT_2_NC_TRACE_SILK  [SMT-JUMPER_2_NC_TRACE_SILK]  44.83,17.65 0 bottom
CHG2  JUMPER-SMT_2_NC_TRACE_SILK  [SMT-JUMPER_2_NC_TRACE_SILK]  68.2,17.65 0 bottom
CHG3  JUMPER-SMT_2_NC_TRACE_SILK  [SMT-JUMPER_2_NC_TRACE_SILK]  91.57,17.65 0 bottom
CHG4  JUMPER-SMT_2_NC_TRACE_SILK  [SMT-JUMPER_2_NC_TRACE_SILK]  21.46,79.12 0 bottom
CHG5  JUMPER-SMT_2_NC_TRACE_SILK  [SMT-JUMPER_2_NC_TRACE_SILK]  44.83,79.12 0 bottom
CHG6  JUMPER-SMT_2_NC_TRACE_SILK  [SMT-JUMPER_2_NC_TRACE_SILK]  68.2,79.12 0 bottom
CHG7  JUMPER-SMT_2_NC_TRACE_SILK  [SMT-JUMPER_2_NC_TRACE_SILK]  91.57,79.12 0 bottom
CHG8  JUMPER-SMT_2_NC_TRACE_SILK  [SMT-JUMPER_2_NC_TRACE_SILK]  21.46,140.59 0 bottom
CHG9  JUMPER-SMT_2_NC_TRACE_SILK  [SMT-JUMPER_2_NC_TRACE_SILK]  44.83,140.59 0 bottom
CHG10  JUMPER-SMT_2_NC_TRACE_SILK  [SMT-JUMPER_2_NC_TRACE_SILK]  68.2,140.59 0 bottom
CHG11  JUMPER-SMT_2_NC_TRACE_SILK  [SMT-JUMPER_2_NC_TRACE_SILK]  91.57,140.59 0 bottom
CHG_I  JUMPER-SMT_3_1-NC_TRACE_SILK  [SMT-JUMPER_3_1-NC_TRACE_SILK]  22.1,22.1 0 bottom
CHG_I1  JUMPER-SMT_3_1-NC_TRACE_SILK  [SMT-JUMPER_3_1-NC_TRACE_SILK]  45.47,22.1 0 bottom
CHG_I2  JUMPER-SMT_3_1-NC_TRACE_SILK  [SMT-JUMPER_3_1-NC_TRACE_SILK]  68.83,22.1 0 bottom
CHG_I3  JUMPER-SMT_3_1-NC_TRACE_SILK  [SMT-JUMPER_3_1-NC_TRACE_SILK]  92.2,22.1 0 bottom
CHG_I4  JUMPER-SMT_3_1-NC_TRACE_SILK  [SMT-JUMPER_3_1-NC_TRACE_SILK]  22.1,83.57 0 bottom
CHG_I5  JUMPER-SMT_3_1-NC_TRACE_SILK  [SMT-JUMPER_3_1-NC_TRACE_SILK]  45.47,83.57 0 bottom
CHG_I6  JUMPER-SMT_3_1-NC_TRACE_SILK  [SMT-JUMPER_3_1-NC_TRACE_SILK]  68.83,83.57 0 bottom
CHG_I7  JUMPER-SMT_3_1-NC_TRACE_SILK  [SMT-JUMPER_3_1-NC_TRACE_SILK]  92.2,83.57 0 bottom
CHG_I8  JUMPER-SMT_3_1-NC_TRACE_SILK  [SMT-JUMPER_3_1-NC_TRACE_SILK]  22.1,145.03 0 bottom
CHG_I9  JUMPER-SMT_3_1-NC_TRACE_SILK  [SMT-JUMPER_3_1-NC_TRACE_SILK]  45.47,145.03 0 bottom
CHG_I10  JUMPER-SMT_3_1-NC_TRACE_SILK  [SMT-JUMPER_3_1-NC_TRACE_SILK]  68.83,145.03 0 bottom
CHG_I11  JUMPER-SMT_3_1-NC_TRACE_SILK  [SMT-JUMPER_3_1-NC_TRACE_SILK]  92.2,145.03 0 bottom
D1  1A/23V/620mV  [SOD-323]  27.18,17.02 270 top
D2  Yellow  [LED-0603]  19.56,24 270 top
D3  PRTR5V0U2F  [SOT886]  18.29,17.32 90 top
D3_ISO  JUMPER-SMT_2_NC_TRACE_SILK  [SMT-JUMPER_2_NC_TRACE_SILK]  26.54,33.53 270 bottom
D3_ISO1  JUMPER-SMT_2_NC_TRACE_SILK  [SMT-JUMPER_2_NC_TRACE_SILK]  49.91,33.53 270 bottom
D3_ISO2  JUMPER-SMT_2_NC_TRACE_SILK  [SMT-JUMPER_2_NC_TRACE_SILK]  73.28,33.53 270 bottom
D3_ISO3  JUMPER-SMT_2_NC_TRACE_SILK  [SMT-JUMPER_2_NC_TRACE_SILK]  96.65,33.53 270 bottom
D3_ISO4  JUMPER-SMT_2_NC_TRACE_SILK  [SMT-JUMPER_2_NC_TRACE_SILK]  26.54,95 270 bottom
D3_ISO5  JUMPER-SMT_2_NC_TRACE_SILK  [SMT-JUMPER_2_NC_TRACE_SILK]  49.91,95 270 bottom
D3_ISO6  JUMPER-SMT_2_NC_TRACE_SILK  [SMT-JUMPER_2_NC_TRACE_SILK]  73.28,95 270 bottom
D3_ISO7  JUMPER-SMT_2_NC_TRACE_SILK  [SMT-JUMPER_2_NC_TRACE_SILK]  96.65,95 270 bottom
D3_ISO8  JUMPER-SMT_2_NC_TRACE_SILK  [SMT-JUMPER_2_NC_TRACE_SILK]  26.54,156.46 270 bottom
D3_ISO9  JUMPER-SMT_2_NC_TRACE_SILK  [SMT-JUMPER_2_NC_TRACE_SILK]  49.91,156.46 270 bottom
D3_ISO10  JUMPER-SMT_2_NC_TRACE_SILK  [SMT-JUMPER_2_NC_TRACE_SILK]  73.28,156.46 270 bottom
D3_ISO11  JUMPER-SMT_2_NC_TRACE_SILK  [SMT-JUMPER_2_NC_TRACE_SILK]  96.65,156.46 270 bottom
D4  BLUE  [LED-0603]  13.46,48.51 270 top
D5  RED  [LED-0603]  12.83,12.57 270 top
D6  BLUE  [LED-0603]  24,34.8 270 top
D7  1A/23V/620mV  [SOD-323]  50.55,17.02 270 top
D8  120mA/40V/370mV  [SOD-523]  22.73,47.5 180 bottom
D9  Yellow  [LED-0603]  42.93,24 270 top
D10  PRTR5V0U2F  [SOT886]  41.66,17.32 90 top
D11  BLUE  [LED-0603]  36.83,48.51 270 top
D12  RED  [LED-0603]  36.2,12.57 270 top
D13  BLUE  [LED-0603]  47.37,34.8 270 top
D14  120mA/40V/370mV  [SOD-523]  46.1,47.5 180 bottom
D15  1A/23V/620mV  [SOD-323]  73.91,17.02 270 top
D16  Yellow  [LED-0603]  66.29,24 270 top
D17  PRTR5V0U2F  [SOT886]  65.02,17.32 90 top
D18  BLUE  [LED-0603]  60.2,48.51 270 top
D19  RED  [LED-0603]  59.56,12.57 270 top
D20  BLUE  [LED-0603]  70.74,34.8 270 top
D21  120mA/40V/370mV  [SOD-523]  69.47,47.5 180 bottom
D22  1A/23V/620mV  [SOD-323]  97.28,17.02 270 top
D23  Yellow  [LED-0603]  89.66,24 270 top
D24  PRTR5V0U2F  [SOT886]  88.39,17.32 90 top
D25  BLUE  [LED-0603]  83.57,48.51 270 top
D26  RED  [LED-0603]  82.93,12.57 270 top
D27  BLUE  [LED-0603]  94.11,34.8 270 top
D28  120mA/40V/370mV  [SOD-523]  92.84,47.5 180 bottom
D29  1A/23V/620mV  [SOD-323]  27.18,78.49 270 top
D30  Yellow  [LED-0603]  19.56,85.47 270 top
D31  PRTR5V0U2F  [SOT886]  18.29,78.79 90 top
D32  BLUE  [LED-0603]  13.46,109.98 270 top
D33  RED  [LED-0603]  12.83,74.04 270 top
D34  BLUE  [LED-0603]  24,96.27 270 top
D35  120mA/40V/370mV  [SOD-523]  22.73,108.97 180 bottom
D36  1A/23V/620mV  [SOD-323]  50.55,78.49 270 top
D37  Yellow  [LED-0603]  42.93,85.47 270 top
D38  PRTR5V0U2F  [SOT886]  41.66,78.79 90 top
D39  BLUE  [LED-0603]  36.83,109.98 270 top
D40  RED  [LED-0603]  36.2,74.04 270 top
D41  BLUE  [LED-0603]  47.37,96.27 270 top
D42  120mA/40V/370mV  [SOD-523]  46.1,108.97 180 bottom
D43  1A/23V/620mV  [SOD-323]  73.91,78.49 270 top
D44  Yellow  [LED-0603]  66.29,85.47 270 top
D45  PRTR5V0U2F  [SOT886]  65.02,78.79 90 top
D46  BLUE  [LED-0603]  60.2,109.98 270 top
D47  RED  [LED-0603]  59.56,74.04 270 top
D48  BLUE  [LED-0603]  70.74,96.27 270 top
D49  120mA/40V/370mV  [SOD-523]  69.47,108.97 180 bottom
D50  1A/23V/620mV  [SOD-323]  97.28,78.49 270 top
D51  Yellow  [LED-0603]  89.66,85.47 270 top
D52  PRTR5V0U2F  [SOT886]  88.39,78.79 90 top
D53  BLUE  [LED-0603]  83.57,109.98 270 top
D54  RED  [LED-0603]  82.93,74.04 270 top
D55  BLUE  [LED-0603]  94.11,96.27 270 top
D56  120mA/40V/370mV  [SOD-523]  92.84,108.97 180 bottom
D57  1A/23V/620mV  [SOD-323]  27.18,139.95 270 top
D58  Yellow  [LED-0603]  19.56,146.94 270 top
D59  PRTR5V0U2F  [SOT886]  18.29,140.26 90 top
D60  BLUE  [LED-0603]  13.46,171.45 270 top
D61  RED  [LED-0603]  12.83,135.51 270 top
D62  BLUE  [LED-0603]  24,157.73 270 top
D63  120mA/40V/370mV  [SOD-523]  22.73,170.43 180 bottom
D64  1A/23V/620mV  [SOD-323]  50.55,139.95 270 top
D65  Yellow  [LED-0603]  42.93,146.94 270 top
D66  PRTR5V0U2F  [SOT886]  41.66,140.26 90 top
D67  BLUE  [LED-0603]  36.83,171.45 270 top
D68  RED  [LED-0603]  36.2,135.51 270 top
D69  BLUE  [LED-0603]  47.37,157.73 270 top
D70  120mA/40V/370mV  [SOD-523]  46.1,170.43 180 bottom
D71  1A/23V/620mV  [SOD-323]  73.91,139.95 270 top
D72  Yellow  [LED-0603]  66.29,146.94 270 top
D73  PRTR5V0U2F  [SOT886]  65.02,140.26 90 top
D74  BLUE  [LED-0603]  60.2,171.45 270 top
D75  RED  [LED-0603]  59.56,135.51 270 top
D76  BLUE  [LED-0603]  70.74,157.73 270 top
D77  120mA/40V/370mV  [SOD-523]  69.47,170.43 180 bottom
D78  1A/23V/620mV  [SOD-323]  97.28,139.95 270 top
D79  Yellow  [LED-0603]  89.66,146.94 270 top
D80  PRTR5V0U2F  [SOT886]  88.39,140.26 90 top
D81  BLUE  [LED-0603]  83.57,171.45 270 top
D82  RED  [LED-0603]  82.93,135.51 270 top
D83  BLUE  [LED-0603]  94.11,157.73 270 top
D84  120mA/40V/370mV  [SOD-523]  92.84,170.43 180 bottom
E$1  [FIDUCIAL-1X2]  4.23,190.63 0 top
E$2  [FIDUCIAL-1X2]  4.23,190.63 0 bottom
E$3  [FIDUCIAL-1X2]  102.45,190.63 0 top
E$4  [FIDUCIAL-1X2]  102.45,190.63 0 bottom
E$5  [FIDUCIAL-1.5X3]  4.23,15.75 0 top
E$6  [FIDUCIAL-1.5X3]  4.23,15.75 0 bottom
FB1  FERRITE_BEAD-120_OHM-0402T  [0402-TIGHT]  12.57,36.07 0 top
FB2  FERRITE_BEAD-120_OHM-0402T  [0402-TIGHT]  35.94,36.07 0 top
FB3  FERRITE_BEAD-120_OHM-0402T  [0402-TIGHT]  59.31,36.07 0 top
FB4  FERRITE_BEAD-120_OHM-0402T  [0402-TIGHT]  82.68,36.07 0 top
FB5  FERRITE_BEAD-120_OHM-0402T  [0402-TIGHT]  12.57,97.54 0 top
FB6  FERRITE_BEAD-120_OHM-0402T  [0402-TIGHT]  35.94,97.54 0 top
FB7  FERRITE_BEAD-120_OHM-0402T  [0402-TIGHT]  59.31,97.54 0 top
FB8  FERRITE_BEAD-120_OHM-0402T  [0402-TIGHT]  82.68,97.54 0 top
FB9  FERRITE_BEAD-120_OHM-0402T  [0402-TIGHT]  12.57,159 0 top
FB10  FERRITE_BEAD-120_OHM-0402T  [0402-TIGHT]  35.94,159 0 top
FB11  FERRITE_BEAD-120_OHM-0402T  [0402-TIGHT]  59.31,159 0 top
FB12  FERRITE_BEAD-120_OHM-0402T  [0402-TIGHT]  82.68,159 0 top
FD1  FIDUCIAL1X2  [FIDUCIAL-1X2]  7.75,63.88 0 bottom
FD2  FIDUCIAL1X2  [FIDUCIAL-1X2]  7.75,63.88 0 top
FD3  FIDUCIAL1X2  [FIDUCIAL-1X2]  24.64,10.67 0 top
FD4  FIDUCIAL1X2  [FIDUCIAL-1X2]  24.64,10.67 0 bottom
FD5  FIDUCIAL1X2  [FIDUCIAL-1X2]  31.12,63.88 0 bottom
FD6  FIDUCIAL1X2  [FIDUCIAL-1X2]  31.12,63.88 0 top
FD7  FIDUCIAL1X2  [FIDUCIAL-1X2]  48.01,10.67 0 top
FD8  FIDUCIAL1X2  [FIDUCIAL-1X2]  48.01,10.67 0 bottom
FD9  FIDUCIAL1X2  [FIDUCIAL-1X2]  54.48,63.88 0 bottom
FD10  FIDUCIAL1X2  [FIDUCIAL-1X2]  54.48,63.88 0 top
FD11  FIDUCIAL1X2  [FIDUCIAL-1X2]  71.37,10.67 0 top
FD12  FIDUCIAL1X2  [FIDUCIAL-1X2]  71.37,10.67 0 bottom
FD13  FIDUCIAL1X2  [FIDUCIAL-1X2]  77.85,63.88 0 bottom
FD14  FIDUCIAL1X2  [FIDUCIAL-1X2]  77.85,63.88 0 top
FD15  FIDUCIAL1X2  [FIDUCIAL-1X2]  94.74,10.67 0 top
FD16  FIDUCIAL1X2  [FIDUCIAL-1X2]  94.74,10.67 0 bottom
FD17  FIDUCIAL1X2  [FIDUCIAL-1X2]  7.75,125.35 0 bottom
FD18  FIDUCIAL1X2  [FIDUCIAL-1X2]  7.75,125.35 0 top
FD19  FIDUCIAL1X2  [FIDUCIAL-1X2]  24.64,72.14 0 top
FD20  FIDUCIAL1X2  [FIDUCIAL-1X2]  24.64,72.14 0 bottom
FD21  FIDUCIAL1X2  [FIDUCIAL-1X2]  31.12,125.35 0 bottom
FD22  FIDUCIAL1X2  [FIDUCIAL-1X2]  31.12,125.35 0 top
FD23  FIDUCIAL1X2  [FIDUCIAL-1X2]  48.01,72.14 0 top
FD24  FIDUCIAL1X2  [FIDUCIAL-1X2]  48.01,72.14 0 bottom
FD25  FIDUCIAL1X2  [FIDUCIAL-1X2]  54.48,125.35 0 bottom
FD26  FIDUCIAL1X2  [FIDUCIAL-1X2]  54.48,125.35 0 top
FD27  FIDUCIAL1X2  [FIDUCIAL-1X2]  71.37,72.14 0 top
FD28  FIDUCIAL1X2  [FIDUCIAL-1X2]  71.37,72.14 0 bottom
FD29  FIDUCIAL1X2  [FIDUCIAL-1X2]  77.85,125.35 0 bottom
FD30  FIDUCIAL1X2  [FIDUCIAL-1X2]  77.85,125.35 0 top
FD31  FIDUCIAL1X2  [FIDUCIAL-1X2]  94.74,72.14 0 top
FD32  FIDUCIAL1X2  [FIDUCIAL-1X2]  94.74,72.14 0 bottom
FD33  FIDUCIAL1X2  [FIDUCIAL-1X2]  7.75,186.82 0 bottom
FD34  FIDUCIAL1X2  [FIDUCIAL-1X2]  7.75,186.82 0 top
FD35  FIDUCIAL1X2  [FIDUCIAL-1X2]  24.64,133.6 0 top
FD36  FIDUCIAL1X2  [FIDUCIAL-1X2]  24.64,133.6 0 bottom
FD37  FIDUCIAL1X2  [FIDUCIAL-1X2]  31.12,186.82 0 bottom
FD38  FIDUCIAL1X2  [FIDUCIAL-1X2]  31.12,186.82 0 top
FD39  FIDUCIAL1X2  [FIDUCIAL-1X2]  48.01,133.6 0 top
FD40  FIDUCIAL1X2  [FIDUCIAL-1X2]  48.01,133.6 0 bottom
FD41  FIDUCIAL1X2  [FIDUCIAL-1X2]  54.48,186.82 0 bottom
FD42  FIDUCIAL1X2  [FIDUCIAL-1X2]  54.48,186.82 0 top
FD43  FIDUCIAL1X2  [FIDUCIAL-1X2]  71.37,133.6 0 top
FD44  FIDUCIAL1X2  [FIDUCIAL-1X2]  71.37,133.6 0 bottom
FD45  FIDUCIAL1X2  [FIDUCIAL-1X2]  77.85,186.82 0 bottom
FD46  FIDUCIAL1X2  [FIDUCIAL-1X2]  77.85,186.82 0 top
FD47  FIDUCIAL1X2  [FIDUCIAL-1X2]  94.74,133.6 0 top
FD48  FIDUCIAL1X2  [FIDUCIAL-1X2]  94.74,133.6 0 bottom
H1  STAND-OFF  [STAND-OFF]  9.4,11.94 0 top
H2  STAND-OFF  [STAND-OFF]  27.18,11.94 0 top
H3  STAND-OFF  [STAND-OFF]  32.77,11.94 0 top
H4  STAND-OFF  [STAND-OFF]  50.55,11.94 0 top
H5  STAND-OFF  [STAND-OFF]  56.13,11.94 0 top
H6  STAND-OFF  [STAND-OFF]  73.91,11.94 0 top
H7  STAND-OFF  [STAND-OFF]  79.5,11.94 0 top
H8  STAND-OFF  [STAND-OFF]  97.28,11.94 0 top
H9  STAND-OFF  [STAND-OFF]  9.4,73.41 0 top
H10  STAND-OFF  [STAND-OFF]  27.18,73.41 0 top
H11  STAND-OFF  [STAND-OFF]  32.77,73.41 0 top
H12  STAND-OFF  [STAND-OFF]  50.55,73.41 0 top
H13  STAND-OFF  [STAND-OFF]  56.13,73.41 0 top
H14  STAND-OFF  [STAND-OFF]  73.91,73.41 0 top
H15  STAND-OFF  [STAND-OFF]  79.5,73.41 0 top
H16  STAND-OFF  [STAND-OFF]  97.28,73.41 0 top
H17  STAND-OFF  [STAND-OFF]  9.4,134.87 0 top
H18  STAND-OFF  [STAND-OFF]  27.18,134.87 0 top
H19  STAND-OFF  [STAND-OFF]  32.77,134.87 0 top
H20  STAND-OFF  [STAND-OFF]  50.55,134.87 0 top
H21  STAND-OFF  [STAND-OFF]  56.13,134.87 0 top
H22  STAND-OFF  [STAND-OFF]  73.91,134.87 0 top
H23  STAND-OFF  [STAND-OFF]  79.5,134.87 0 top
H24  STAND-OFF  [STAND-OFF]  97.28,134.87 0 top
I2C  JUMPER-SMT_3_2-NC_TRACE_SILK  [SMT-JUMPER_3_2-NC_TRACE_SILK]  11.94,17.65 270 bottom
I2C1  JUMPER-SMT_3_2-NC_TRACE_SILK  [SMT-JUMPER_3_2-NC_TRACE_SILK]  35.31,17.65 270 bottom
I2C2  JUMPER-SMT_3_2-NC_TRACE_SILK  [SMT-JUMPER_3_2-NC_TRACE_SILK]  58.67,17.65 270 bottom
I2C3  JUMPER-SMT_3_2-NC_TRACE_SILK  [SMT-JUMPER_3_2-NC_TRACE_SILK]  82.04,17.65 270 bottom
I2C4  JUMPER-SMT_3_2-NC_TRACE_SILK  [SMT-JUMPER_3_2-NC_TRACE_SILK]  11.94,79.12 270 bottom
I2C5  JUMPER-SMT_3_2-NC_TRACE_SILK  [SMT-JUMPER_3_2-NC_TRACE_SILK]  35.31,79.12 270 bottom
I2C6  JUMPER-SMT_3_2-NC_TRACE_SILK  [SMT-JUMPER_3_2-NC_TRACE_SILK]  58.67,79.12 270 bottom
I2C7  JUMPER-SMT_3_2-NC_TRACE_SILK  [SMT-JUMPER_3_2-NC_TRACE_SILK]  82.04,79.12 270 bottom
I2C8  JUMPER-SMT_3_2-NC_TRACE_SILK  [SMT-JUMPER_3_2-NC_TRACE_SILK]  11.94,140.59 270 bottom
I2C9  JUMPER-SMT_3_2-NC_TRACE_SILK  [SMT-JUMPER_3_2-NC_TRACE_SILK]  35.31,140.59 270 bottom
I2C10  JUMPER-SMT_3_2-NC_TRACE_SILK  [SMT-JUMPER_3_2-NC_TRACE_SILK]  58.67,140.59 270 bottom
I2C11  JUMPER-SMT_3_2-NC_TRACE_SILK  [SMT-JUMPER_3_2-NC_TRACE_SILK]  82.04,140.59 270 bottom
J1  THING_PLUS_LOGICAL  [THING_PLUS]  6.86,9.4 0 top
J2  USB Female Type C Connector  [USB-C-16P-4LAYER-ISOLATED]  18.29,15.75 0 top
J3  QWIIC_RIGHT_ANGLE  [JST04_1MM_RA]  11.94,18.29 270 top
J4  [JST-2-SMD]  10.67,27.18 90 top
J5  MICRO-SDFRICTION  [MICROSD_TINY]  15.75,24.64 90 bottom
J6  THING_PLUS_LOGICAL  [THING_PLUS]  30.23,9.4 0 top
J7  [2X5_PTH_SILK_.05]  15.75,48.77 0 top
J8  USB Female Type C Connector  [USB-C-16P-4LAYER-ISOLATED]  41.66,15.75 0 top
J9  [JST-2-SMD]  34.04,27.18 90 top
J10  QWIIC_RIGHT_ANGLE  [JST04_1MM_RA]  35.31,18.29 270 top
J11  MICRO-SDFRICTION  [MICROSD_TINY]  39.12,24.64 90 bottom
J12  [2X5_PTH_SILK_.05]  39.12,48.77 0 top
J13  THING_PLUS_LOGICAL  [THING_PLUS]  53.59,9.4 0 top
J14  USB Female Type C Connector  [USB-C-16P-4LAYER-ISOLATED]  65.02,15.75 0 top
J15  [JST-2-SMD]  57.4,27.18 90 top
J16  QWIIC_RIGHT_ANGLE  [JST04_1MM_RA]  58.67,18.29 270 top
J17  MICRO-SDFRICTION  [MICROSD_TINY]  62.48,24.64 90 bottom
J18  [2X5_PTH_SILK_.05]  62.48,48.77 0 top
J19  THING_PLUS_LOGICAL  [THING_PLUS]  76.96,9.4 0 top
J20  USB Female Type C Connector  [USB-C-16P-4LAYER-ISOLATED]  88.39,15.75 0 top
J21  [JST-2-SMD]  80.77,27.18 90 top
J22  QWIIC_RIGHT_ANGLE  [JST04_1MM_RA]  82.04,18.29 270 top
J23  MICRO-SDFRICTION  [MICROSD_TINY]  85.85,24.64 90 bottom
J24  [2X5_PTH_SILK_.05]  85.85,48.77 0 top
J25  THING_PLUS_LOGICAL  [THING_PLUS]  6.86,70.87 0 top
J26  USB Female Type C Connector  [USB-C-16P-4LAYER-ISOLATED]  18.29,77.22 0 top
J27  [JST-2-SMD]  10.67,88.65 90 top
J28  QWIIC_RIGHT_ANGLE  [JST04_1MM_RA]  11.94,79.76 270 top
J29  MICRO-SDFRICTION  [MICROSD_TINY]  15.75,86.11 90 bottom
J30  [2X5_PTH_SILK_.05]  15.75,110.24 0 top
J31  THING_PLUS_LOGICAL  [THING_PLUS]  30.23,70.87 0 top
J32  USB Female Type C Connector  [USB-C-16P-4LAYER-ISOLATED]  41.66,77.22 0 top
J33  [JST-2-SMD]  34.04,88.65 90 top
J34  QWIIC_RIGHT_ANGLE  [JST04_1MM_RA]  35.31,79.76 270 top
J35  MICRO-SDFRICTION  [MICROSD_TINY]  39.12,86.11 90 bottom
J36  [2X5_PTH_SILK_.05]  39.12,110.24 0 top
J37  THING_PLUS_LOGICAL  [THING_PLUS]  53.59,70.87 0 top
J38  USB Female Type C Connector  [USB-C-16P-4LAYER-ISOLATED]  65.02,77.22 0 top
J39  [JST-2-SMD]  57.4,88.65 90 top
J40  QWIIC_RIGHT_ANGLE  [JST04_1MM_RA]  58.67,79.76 270 top
J41  MICRO-SDFRICTION  [MICROSD_TINY]  62.48,86.11 90 bottom
J42  [2X5_PTH_SILK_.05]  62.48,110.24 0 top
J43  THING_PLUS_LOGICAL  [THING_PLUS]  76.96,70.87 0 top
J44  USB Female Type C Connector  [USB-C-16P-4LAYER-ISOLATED]  88.39,77.22 0 top
J45  [JST-2-SMD]  80.77,88.65 90 top
J46  QWIIC_RIGHT_ANGLE  [JST04_1MM_RA]  82.04,79.76 270 top
J47  MICRO-SDFRICTION  [MICROSD_TINY]  85.85,86.11 90 bottom
J48  [2X5_PTH_SILK_.05]  85.85,110.24 0 top
J49  THING_PLUS_LOGICAL  [THING_PLUS]  6.86,132.33 0 top
J50  USB Female Type C Connector  [USB-C-16P-4LAYER-ISOLATED]  18.29,138.68 0 top
J51  [JST-2-SMD]  10.67,150.11 90 top
J52  QWIIC_RIGHT_ANGLE  [JST04_1MM_RA]  11.94,141.22 270 top
J53  MICRO-SDFRICTION  [MICROSD_TINY]  15.75,147.57 90 bottom
J54  [2X5_PTH_SILK_.05]  15.75,171.7 0 top
J55  THING_PLUS_LOGICAL  [THING_PLUS]  30.23,132.33 0 top
J56  USB Female Type C Connector  [USB-C-16P-4LAYER-ISOLATED]  41.66,138.68 0 top
J57  [JST-2-SMD]  34.04,150.11 90 top
J58  QWIIC_RIGHT_ANGLE  [JST04_1MM_RA]  35.31,141.22 270 top
J59  MICRO-SDFRICTION  [MICROSD_TINY]  39.12,147.57 90 bottom
J60  [2X5_PTH_SILK_.05]  39.12,171.7 0 top
J61  THING_PLUS_LOGICAL  [THING_PLUS]  53.59,132.33 0 top
J62  USB Female Type C Connector  [USB-C-16P-4LAYER-ISOLATED]  65.02,138.68 0 top
J63  [JST-2-SMD]  57.4,150.11 90 top
J64  QWIIC_RIGHT_ANGLE  [JST04_1MM_RA]  58.67,141.22 270 top
J65  MICRO-SDFRICTION  [MICROSD_TINY]  62.48,147.57 90 bottom
J66  [2X5_PTH_SILK_.05]  62.48,171.7 0 top
J67  THING_PLUS_LOGICAL  [THING_PLUS]  76.96,132.33 0 top
J68  USB Female Type C Connector  [USB-C-16P-4LAYER-ISOLATED]  88.39,138.68 0 top
J69  [JST-2-SMD]  80.77,150.11 90 top
J70  QWIIC_RIGHT_ANGLE  [JST04_1MM_RA]  82.04,141.22 270 top
J71  MICRO-SDFRICTION  [MICROSD_TINY]  85.85,147.57 90 bottom
J72  [2X5_PTH_SILK_.05]  85.85,171.7 0 top
JP1  JUMPER-SMT_3_1-NC_TRACE_SILK  [SMT-JUMPER_3_1-NC_TRACE_SILK]  25.27,28.45 270 bottom
JP2  JUMPER-SMT_3_1-NC_TRACE_SILK  [SMT-JUMPER_3_1-NC_TRACE_SILK]  48.64,28.45 270 bottom
JP3  JUMPER-SMT_3_1-NC_TRACE_SILK  [SMT-JUMPER_3_1-NC_TRACE_SILK]  72.01,28.45 270 bottom
JP4  JUMPER-SMT_3_1-NC_TRACE_SILK  [SMT-JUMPER_3_1-NC_TRACE_SILK]  95.38,28.45 270 bottom
JP5  JUMPER-SMT_3_1-NC_TRACE_SILK  [SMT-JUMPER_3_1-NC_TRACE_SILK]  25.27,89.92 270 bottom
JP6  JUMPER-SMT_3_1-NC_TRACE_SILK  [SMT-JUMPER_3_1-NC_TRACE_SILK]  48.64,89.92 270 bottom
JP7  JUMPER-SMT_3_1-NC_TRACE_SILK  [SMT-JUMPER_3_1-NC_TRACE_SILK]  72.01,89.92 270 bottom
JP8  JUMPER-SMT_3_1-NC_TRACE_SILK  [SMT-JUMPER_3_1-NC_TRACE_SILK]  95.38,89.92 270 bottom
JP9  JUMPER-SMT_3_1-NC_TRACE_SILK  [SMT-JUMPER_3_1-NC_TRACE_SILK]  25.27,151.38 270 bottom
JP10  JUMPER-SMT_3_1-NC_TRACE_SILK  [SMT-JUMPER_3_1-NC_TRACE_SILK]  48.64,151.38 270 bottom
JP11  JUMPER-SMT_3_1-NC_TRACE_SILK  [SMT-JUMPER_3_1-NC_TRACE_SILK]  72.01,151.38 270 bottom
JP12  JUMPER-SMT_3_1-NC_TRACE_SILK  [SMT-JUMPER_3_1-NC_TRACE_SILK]  95.38,151.38 270 bottom
LOGO1  SFE_LOGO_NAME_FLAME.1_INCH  [SFE_LOGO_NAME_FLAME_.1]  23.75,63.75 0 bottom
LOGO2  QWIIC_LOGO_3MM  [QWIIC_3MM]  10.79,14.73 0 top
LOGO3  OSHW-LOGOS  [OSHW-LOGO-S]  9.4,65.28 0 top
LOGO4  SFE_LOGO_NAME_FLAME.1_INCH  [SFE_LOGO_NAME_FLAME_.1]  47.12,63.75 0 bottom
LOGO5  QWIIC_LOGO_3MM  [QWIIC_3MM]  34.16,14.73 0 top
LOGO6  OSHW-LOGOS  [OSHW-LOGO-S]  32.77,65.28 0 top
LOGO7  SFE_LOGO_NAME_FLAME.1_INCH  [SFE_LOGO_NAME_FLAME_.1]  70.48,63.75 0 bottom
LOGO8  QWIIC_LOGO_3MM  [QWIIC_3MM]  57.53,14.73 0 top
LOGO9  OSHW-LOGOS  [OSHW-LOGO-S]  56.13,65.28 0 top
LOGO10  SFE_LOGO_NAME_FLAME.1_INCH  [SFE_LOGO_NAME_FLAME_.1]  93.85,63.75 0 bottom
LOGO11  QWIIC_LOGO_3MM  [QWIIC_3MM]  80.9,14.73 0 top
LOGO12  OSHW-LOGOS  [OSHW-LOGO-S]  79.5,65.28 0 top
LOGO13  SFE_LOGO_NAME_FLAME.1_INCH  [SFE_LOGO_NAME_FLAME_.1]  23.75,125.22 0 bottom
LOGO14  QWIIC_LOGO_3MM  [QWIIC_3MM]  10.79,76.2 0 top
LOGO15  OSHW-LOGOS  [OSHW-LOGO-S]  9.4,126.75 0 top
LOGO16  SFE_LOGO_NAME_FLAME.1_INCH  [SFE_LOGO_NAME_FLAME_.1]  47.12,125.22 0 bottom
LOGO17  QWIIC_LOGO_3MM  [QWIIC_3MM]  34.16,76.2 0 top
LOGO18  OSHW-LOGOS  [OSHW-LOGO-S]  32.77,126.75 0 top
LOGO19  SFE_LOGO_NAME_FLAME.1_INCH  [SFE_LOGO_NAME_FLAME_.1]  70.48,125.22 0 bottom
LOGO20  QWIIC_LOGO_3MM  [QWIIC_3MM]  57.53,76.2 0 top
LOGO21  OSHW-LOGOS  [OSHW-LOGO-S]  56.13,126.75 0 top
LOGO22  SFE_LOGO_NAME_FLAME.1_INCH  [SFE_LOGO_NAME_FLAME_.1]  93.85,125.22 0 bottom
LOGO23  QWIIC_LOGO_3MM  [QWIIC_3MM]  80.9,76.2 0 top
LOGO24  OSHW-LOGOS  [OSHW-LOGO-S]  79.5,126.75 0 top
LOGO25  SFE_LOGO_NAME_FLAME.1_INCH  [SFE_LOGO_NAME_FLAME_.1]  23.75,186.69 0 bottom
LOGO26  QWIIC_LOGO_3MM  [QWIIC_3MM]  10.79,137.67 0 top
LOGO27  OSHW-LOGOS  [OSHW-LOGO-S]  9.4,188.21 0 top
LOGO28  SFE_LOGO_NAME_FLAME.1_INCH  [SFE_LOGO_NAME_FLAME_.1]  47.12,186.69 0 bottom
LOGO29  QWIIC_LOGO_3MM  [QWIIC_3MM]  34.16,137.67 0 top
LOGO30  OSHW-LOGOS  [OSHW-LOGO-S]  32.77,188.21 0 top
LOGO31  SFE_LOGO_NAME_FLAME.1_INCH  [SFE_LOGO_NAME_FLAME_.1]  70.48,186.69 0 bottom
LOGO32  QWIIC_LOGO_3MM  [QWIIC_3MM]  57.53,137.67 0 top
LOGO33  OSHW-LOGOS  [OSHW-LOGO-S]  56.13,188.21 0 top
LOGO34  SFE_LOGO_NAME_FLAME.1_INCH  [SFE_LOGO_NAME_FLAME_.1]  93.85,186.69 0 bottom
LOGO35  QWIIC_LOGO_3MM  [QWIIC_3MM]  80.9,137.67 0 top
LOGO36  OSHW-LOGOS  [OSHW-LOGO-S]  79.5,188.21 0 top
LP  JUMPER-SMT_2_NC_TRACE_SILK  [SMT-JUMPER_2_NC_TRACE_SILK]  24,38.61 270 bottom
LP1  JUMPER-SMT_2_NC_TRACE_SILK  [SMT-JUMPER_2_NC_TRACE_SILK]  47.37,38.61 270 bottom
LP2  JUMPER-SMT_2_NC_TRACE_SILK  [SMT-JUMPER_2_NC_TRACE_SILK]  70.74,38.61 270 bottom
LP3  JUMPER-SMT_2_NC_TRACE_SILK  [SMT-JUMPER_2_NC_TRACE_SILK]  94.11,38.61 270 bottom
LP4  JUMPER-SMT_2_NC_TRACE_SILK  [SMT-JUMPER_2_NC_TRACE_SILK]  24,100.08 270 bottom
LP5  JUMPER-SMT_2_NC_TRACE_SILK  [SMT-JUMPER_2_NC_TRACE_SILK]  47.37,100.08 270 bottom
LP6  JUMPER-SMT_2_NC_TRACE_SILK  [SMT-JUMPER_2_NC_TRACE_SILK]  70.74,100.08 270 bottom
LP7  JUMPER-SMT_2_NC_TRACE_SILK  [SMT-JUMPER_2_NC_TRACE_SILK]  94.11,100.08 270 bottom
LP8  JUMPER-SMT_2_NC_TRACE_SILK  [SMT-JUMPER_2_NC_TRACE_SILK]  24,161.54 270 bottom
LP9  JUMPER-SMT_2_NC_TRACE_SILK  [SMT-JUMPER_2_NC_TRACE_SILK]  47.37,161.54 270 bottom
LP10  JUMPER-SMT_2_NC_TRACE_SILK  [SMT-JUMPER_2_NC_TRACE_SILK]  70.74,161.54 270 bottom
LP11  JUMPER-SMT_2_NC_TRACE_SILK  [SMT-JUMPER_2_NC_TRACE_SILK]  94.11,161.54 270 bottom
MEAS  JUMPER-COMBO_2_NC_TRACE  [COMBO-JUMPER_2_NC_TRACE]  27.18,20.19 0 bottom
MEAS1  JUMPER-COMBO_2_NC_TRACE  [COMBO-JUMPER_2_NC_TRACE]  50.55,20.19 0 bottom
MEAS2  JUMPER-COMBO_2_NC_TRACE  [COMBO-JUMPER_2_NC_TRACE]  73.91,20.19 0 bottom
MEAS3  JUMPER-COMBO_2_NC_TRACE  [COMBO-JUMPER_2_NC_TRACE]  97.28,20.19 0 bottom
MEAS4  JUMPER-COMBO_2_NC_TRACE  [COMBO-JUMPER_2_NC_TRACE]  27.18,81.66 0 bottom
MEAS5  JUMPER-COMBO_2_NC_TRACE  [COMBO-JUMPER_2_NC_TRACE]  50.55,81.66 0 bottom
MEAS6  JUMPER-COMBO_2_NC_TRACE  [COMBO-JUMPER_2_NC_TRACE]  73.91,81.66 0 bottom
MEAS7  JUMPER-COMBO_2_NC_TRACE  [COMBO-JUMPER_2_NC_TRACE]  97.28,81.66 0 bottom
MEAS8  JUMPER-COMBO_2_NC_TRACE  [COMBO-JUMPER_2_NC_TRACE]  27.18,143.13 0 bottom
MEAS9  JUMPER-COMBO_2_NC_TRACE  [COMBO-JUMPER_2_NC_TRACE]  50.55,143.13 0 bottom
MEAS10  JUMPER-COMBO_2_NC_TRACE  [COMBO-JUMPER_2_NC_TRACE]  73.91,143.13 0 bottom
MEAS11  JUMPER-COMBO_2_NC_TRACE  [COMBO-JUMPER_2_NC_TRACE]  97.28,143.13 0 bottom
PWR  JUMPER-SMT_2_NC_TRACE_SILK  [SMT-JUMPER_2_NC_TRACE_SILK]  8.64,16.13 90 bottom
PWR1  JUMPER-SMT_2_NC_TRACE_SILK  [SMT-JUMPER_2_NC_TRACE_SILK]  32,16.13 90 bottom
PWR2  JUMPER-SMT_2_NC_TRACE_SILK  [SMT-JUMPER_2_NC_TRACE_SILK]  55.37,16.13 90 bottom
PWR3  JUMPER-SMT_2_NC_TRACE_SILK  [SMT-JUMPER_2_NC_TRACE_SILK]  78.74,16.13 90 bottom
PWR4  JUMPER-SMT_2_NC_TRACE_SILK  [SMT-JUMPER_2_NC_TRACE_SILK]  8.64,77.6 90 bottom
PWR5  JUMPER-SMT_2_NC_TRACE_SILK  [SMT-JUMPER_2_NC_TRACE_SILK]  32,77.6 90 bottom
PWR6  JUMPER-SMT_2_NC_TRACE_SILK  [SMT-JUMPER_2_NC_TRACE_SILK]  55.37,77.6 90 bottom
PWR7  JUMPER-SMT_2_NC_TRACE_SILK  [SMT-JUMPER_2_NC_TRACE_SILK]  78.74,77.6 90 bottom
PWR8  JUMPER-SMT_2_NC_TRACE_SILK  [SMT-JUMPER_2_NC_TRACE_SILK]  8.64,139.06 90 bottom
PWR9  JUMPER-SMT_2_NC_TRACE_SILK  [SMT-JUMPER_2_NC_TRACE_SILK]  32,139.06 90 bottom
PWR10  JUMPER-SMT_2_NC_TRACE_SILK  [SMT-JUMPER_2_NC_TRACE_SILK]  55.37,139.06 90 bottom
PWR11  JUMPER-SMT_2_NC_TRACE_SILK  [SMT-JUMPER_2_NC_TRACE_SILK]  78.74,139.06 90 bottom
Q1  20V/4.2A/52mΩ/1.4W  [SOT23-3]  24.64,17.02 90 top
Q2  20V/4.2A/52mΩ/1.4W  [SOT23-3]  48.01,17.02 90 top
Q3  20V/4.2A/52mΩ/1.4W  [SOT23-3]  71.37,17.02 90 top
Q4  20V/4.2A/52mΩ/1.4W  [SOT23-3]  94.74,17.02 90 top
Q5  20V/4.2A/52mΩ/1.4W  [SOT23-3]  24.64,78.49 90 top
Q6  20V/4.2A/52mΩ/1.4W  [SOT23-3]  48.01,78.49 90 top
Q7  20V/4.2A/52mΩ/1.4W  [SOT23-3]  71.37,78.49 90 top
Q8  20V/4.2A/52mΩ/1.4W  [SOT23-3]  94.74,78.49 90 top
Q9  20V/4.2A/52mΩ/1.4W  [SOT23-3]  24.64,139.95 90 top
Q10  20V/4.2A/52mΩ/1.4W  [SOT23-3]  48.01,139.95 90 top
Q11  20V/4.2A/52mΩ/1.4W  [SOT23-3]  71.37,139.95 90 top
Q12  20V/4.2A/52mΩ/1.4W  [SOT23-3]  94.74,139.95 90 top
R1  1k  [0402-TIGHT]  15.49,39.88 0 bottom
R2  10k  [0402-TIGHT]  26.8,28.45 90 top
R3  10k  [0402-TIGHT]  28.57,17.02 270 top
R4  4.7k  [0402-TIGHT]  24,20.19 270 top
R5  2.0K  [0402-TIGHT]  21.34,24 270 top
R6  10k  [0402-TIGHT]  22.86,24 270 top
R7  2.2k  [0402-TIGHT]  13.84,17.02 0 top
R8  2.2k  [0402-TIGHT]  13.84,18.29 0 top
R9  5.1k  [0402-TIGHT]  20.19,17.32 270 top
R10  5.1k  [0402-TIGHT]  16.38,17.32 270 top
R11  2.2k  [0402-TIGHT]  10.67,47.5 0 top
R12  2.2k  [0402-TIGHT]  15.49,37.34 0 bottom
R13  1k  [0402-TIGHT]  12.83,15.11 90 top
R14  100k  [0402-TIGHT]  20.19,36.7 270 top
R15  2.2k  [0402-TIGHT]  24,37.34 0 top
R16  2.2k  [0402-TIGHT]  15.49,38.61 0 bottom
R17  10k  [0402-TIGHT]  24,46.23 180 top
R18  1k  [0402-TIGHT]  22.73,47.5 0 top
R19  100k  [0402-TIGHT]  12.57,34.8 0 top
R20  330  [0402-TIGHT]  12.57,46.23 180 top
R21  330  [0402-TIGHT]  24,55.12 0 bottom
R22  10k  [0402-TIGHT]  50.16,28.45 90 top
R23  10k  [0402-TIGHT]  51.94,17.02 270 top
R24  4.7k  [0402-TIGHT]  47.37,20.19 270 top
R25  2.0K  [0402-TIGHT]  44.7,24 270 top
R26  10k  [0402-TIGHT]  46.23,24 270 top
R27  5.1k  [0402-TIGHT]  43.56,17.32 270 top
R28  5.1k  [0402-TIGHT]  39.75,17.32 270 top
R29  2.2k  [0402-TIGHT]  37.21,17.02 0 top
R30  2.2k  [0402-TIGHT]  37.21,18.29 0 top
R31  2.2k  [0402-TIGHT]  34.04,47.5 0 top
R32  1k  [0402-TIGHT]  36.2,15.11 90 top
R33  1k  [0402-TIGHT]  38.86,39.88 0 bottom
R34  100k  [0402-TIGHT]  43.56,36.7 270 top
R35  2.2k  [0402-TIGHT]  47.37,37.34 0 top
R36  2.2k  [0402-TIGHT]  38.86,37.34 0 bottom
R37  2.2k  [0402-TIGHT]  38.86,38.61 0 bottom
R38  10k  [0402-TIGHT]  47.37,46.23 180 top
R39  1k  [0402-TIGHT]  46.1,47.5 0 top
R40  100k  [0402-TIGHT]  35.94,34.8 0 top
R41  330  [0402-TIGHT]  35.94,46.23 180 top
R42  330  [0402-TIGHT]  47.37,55.12 0 bottom
R43  10k  [0402-TIGHT]  73.53,28.45 90 top
R44  10k  [0402-TIGHT]  75.31,17.02 270 top
R45  4.7k  [0402-TIGHT]  70.74,20.19 270 top
R46  2.0K  [0402-TIGHT]  68.07,24 270 top
R47  10k  [0402-TIGHT]  69.6,24 270 top
R48  5.1k  [0402-TIGHT]  66.93,17.32 270 top
R49  5.1k  [0402-TIGHT]  63.12,17.32 270 top
R50  2.2k  [0402-TIGHT]  60.58,17.02 0 top
R51  2.2k  [0402-TIGHT]  60.58,18.29 0 top
R52  2.2k  [0402-TIGHT]  57.4,47.5 0 top
R53  1k  [0402-TIGHT]  59.56,15.11 90 top
R54  1k  [0402-TIGHT]  62.23,39.88 0 bottom
R55  100k  [0402-TIGHT]  66.93,36.7 270 top
R56  2.2k  [0402-TIGHT]  70.74,37.34 0 top
R57  2.2k  [0402-TIGHT]  62.23,37.34 0 bottom
R58  2.2k  [0402-TIGHT]  62.23,38.61 0 bottom
R59  10k  [0402-TIGHT]  70.74,46.23 180 top
R60  1k  [0402-TIGHT]  69.47,47.5 0 top
R61  100k  [0402-TIGHT]  59.31,34.8 0 top
R62  330  [0402-TIGHT]  59.31,46.23 180 top
R63  330  [0402-TIGHT]  70.74,55.12 0 bottom
R64  10k  [0402-TIGHT]  96.9,28.45 90 top
R65  10k  [0402-TIGHT]  98.68,17.02 270 top
R66  4.7k  [0402-TIGHT]  94.11,20.19 270 top
R67  2.0K  [0402-TIGHT]  91.44,24 270 top
R68  10k  [0402-TIGHT]  92.96,24 270 top
R69  5.1k  [0402-TIGHT]  90.3,17.32 270 top
R70  5.1k  [0402-TIGHT]  86.49,17.32 270 top
R71  2.2k  [0402-TIGHT]  83.95,17.02 0 top
R72  2.2k  [0402-TIGHT]  83.95,18.29 0 top
R73  2.2k  [0402-TIGHT]  80.77,47.5 0 top
R74  1k  [0402-TIGHT]  82.93,15.11 90 top
R75  1k  [0402-TIGHT]  85.6,39.88 0 bottom
R76  100k  [0402-TIGHT]  90.3,36.7 270 top
R77  2.2k  [0402-TIGHT]  94.11,37.34 0 top
R78  2.2k  [0402-TIGHT]  85.6,37.34 0 bottom
R79  2.2k  [0402-TIGHT]  85.6,38.61 0 bottom
R80  10k  [0402-TIGHT]  94.11,46.23 180 top
R81  1k  [0402-TIGHT]  92.84,47.5 0 top
R82  100k  [0402-TIGHT]  82.68,34.8 0 top
R83  330  [0402-TIGHT]  82.68,46.23 180 top
R84  330  [0402-TIGHT]  94.11,55.12 0 bottom
R85  10k  [0402-TIGHT]  26.8,89.92 90 top
R86  10k  [0402-TIGHT]  28.57,78.49 270 top
R87  4.7k  [0402-TIGHT]  24,81.66 270 top
R88  2.0K  [0402-TIGHT]  21.34,85.47 270 top
R89  10k  [0402-TIGHT]  22.86,85.47 270 top
R90  5.1k  [0402-TIGHT]  20.19,78.79 270 top
R91  5.1k  [0402-TIGHT]  16.38,78.79 270 top
R92  2.2k  [0402-TIGHT]  13.84,78.49 0 top
R93  2.2k  [0402-TIGHT]  13.84,79.76 0 top
R94  2.2k  [0402-TIGHT]  10.67,108.97 0 top
R95  1k  [0402-TIGHT]  12.83,76.58 90 top
R96  1k  [0402-TIGHT]  15.49,101.35 0 bottom
R97  100k  [0402-TIGHT]  20.19,98.17 270 top
R98  2.2k  [0402-TIGHT]  24,98.81 0 top
R99  2.2k  [0402-TIGHT]  15.49,98.81 0 bottom
R100  2.2k  [0402-TIGHT]  15.49,100.08 0 bottom
R101  10k  [0402-TIGHT]  24,107.7 180 top
R102  1k  [0402-TIGHT]  22.73,108.97 0 top
R103  100k  [0402-TIGHT]  12.57,96.27 0 top
R104  330  [0402-TIGHT]  12.57,107.7 180 top
R105  330  [0402-TIGHT]  24,116.59 0 bottom
R106  10k  [0402-TIGHT]  50.16,89.92 90 top
R107  10k  [0402-TIGHT]  51.94,78.49 270 top
R108  4.7k  [0402-TIGHT]  47.37,81.66 270 top
R109  2.0K  [0402-TIGHT]  44.7,85.47 270 top
R110  10k  [0402-TIGHT]  46.23,85.47 270 top
R111  5.1k  [0402-TIGHT]  43.56,78.79 270 top
R112  5.1k  [0402-TIGHT]  39.75,78.79 270 top
R113  2.2k  [0402-TIGHT]  37.21,78.49 0 top
R114  2.2k  [0402-TIGHT]  37.21,79.76 0 top
R115  2.2k  [0402-TIGHT]  34.04,108.97 0 top
R116  1k  [0402-TIGHT]  36.2,76.58 90 top
R117  1k  [0402-TIGHT]  38.86,101.35 0 bottom
R118  100k  [0402-TIGHT]  43.56,98.17 270 top
R119  2.2k  [0402-TIGHT]  47.37,98.81 0 top
R120  2.2k  [0402-TIGHT]  38.86,98.81 0 bottom
R121  2.2k  [0402-TIGHT]  38.86,100.08 0 bottom
R122  10k  [0402-TIGHT]  47.37,107.7 180 top
R123  1k  [0402-TIGHT]  46.1,108.97 0 top
R124  100k  [0402-TIGHT]  35.94,96.27 0 top
R125  330  [0402-TIGHT]  35.94,107.7 180 top
R126  330  [0402-TIGHT]  47.37,116.59 0 bottom
R127  10k  [0402-TIGHT]  73.53,89.92 90 top
R128  10k  [0402-TIGHT]  75.31,78.49 270 top
R129  4.7k  [0402-TIGHT]  70.74,81.66 270 top
R130  2.0K  [0402-TIGHT]  68.07,85.47 270 top
R131  10k  [0402-TIGHT]  69.6,85.47 270 top
R132  5.1k  [0402-TIGHT]  66.93,78.79 270 top
R133  5.1k  [0402-TIGHT]  63.12,78.79 270 top
R134  2.2k  [0402-TIGHT]  60.58,78.49 0 top
R135  2.2k  [0402-TIGHT]  60.58,79.76 0 top
R136  2.2k  [0402-TIGHT]  57.4,108.97 0 top
R137  1k  [0402-TIGHT]  59.56,76.58 90 top
R138  1k  [0402-TIGHT]  62.23,101.35 0 bottom
R139  100k  [0402-TIGHT]  66.93,98.17 270 top
R140  2.2k  [0402-TIGHT]  70.74,98.81 0 top
R141  2.2k  [0402-TIGHT]  62.23,98.81 0 bottom
R142  2.2k  [0402-TIGHT]  62.23,100.08 0 bottom
R143  10k  [0402-TIGHT]  70.74,107.7 180 top
R144  1k  [0402-TIGHT]  69.47,108.97 0 top
R145  100k  [0402-TIGHT]  59.31,96.27 0 top
R146  330  [0402-TIGHT]  59.31,107.7 180 top
R147  330  [0402-TIGHT]  70.74,116.59 0 bottom
R148  10k  [0402-TIGHT]  96.9,89.92 90 top
R149  10k  [0402-TIGHT]  98.68,78.49 270 top
R150  4.7k  [0402-TIGHT]  94.11,81.66 270 top
R151  2.0K  [0402-TIGHT]  91.44,85.47 270 top
R152  10k  [0402-TIGHT]  92.96,85.47 270 top
R153  5.1k  [0402-TIGHT]  90.3,78.79 270 top
R154  5.1k  [0402-TIGHT]  86.49,78.79 270 top
R155  2.2k  [0402-TIGHT]  83.95,78.49 0 top
R156  2.2k  [0402-TIGHT]  83.95,79.76 0 top
R157  2.2k  [0402-TIGHT]  80.77,108.97 0 top
R158  1k  [0402-TIGHT]  82.93,76.58 90 top